# Altium PCB 04-12307_Drone_ESC.PcbDoc (part 1 of 5)
Units mm, origin at the board's own origin, x right, y up, seen from the top; angles counter-clockwise.
Board outline 55 x 33 mm, 4 copper layers (LAYER 1 (Top), LAYER 2, LAYER 3, LAYER 4 (Bottom)), stack 1.504 mm thick; 174 components, 90 nets, 407 pads, 193 vias.
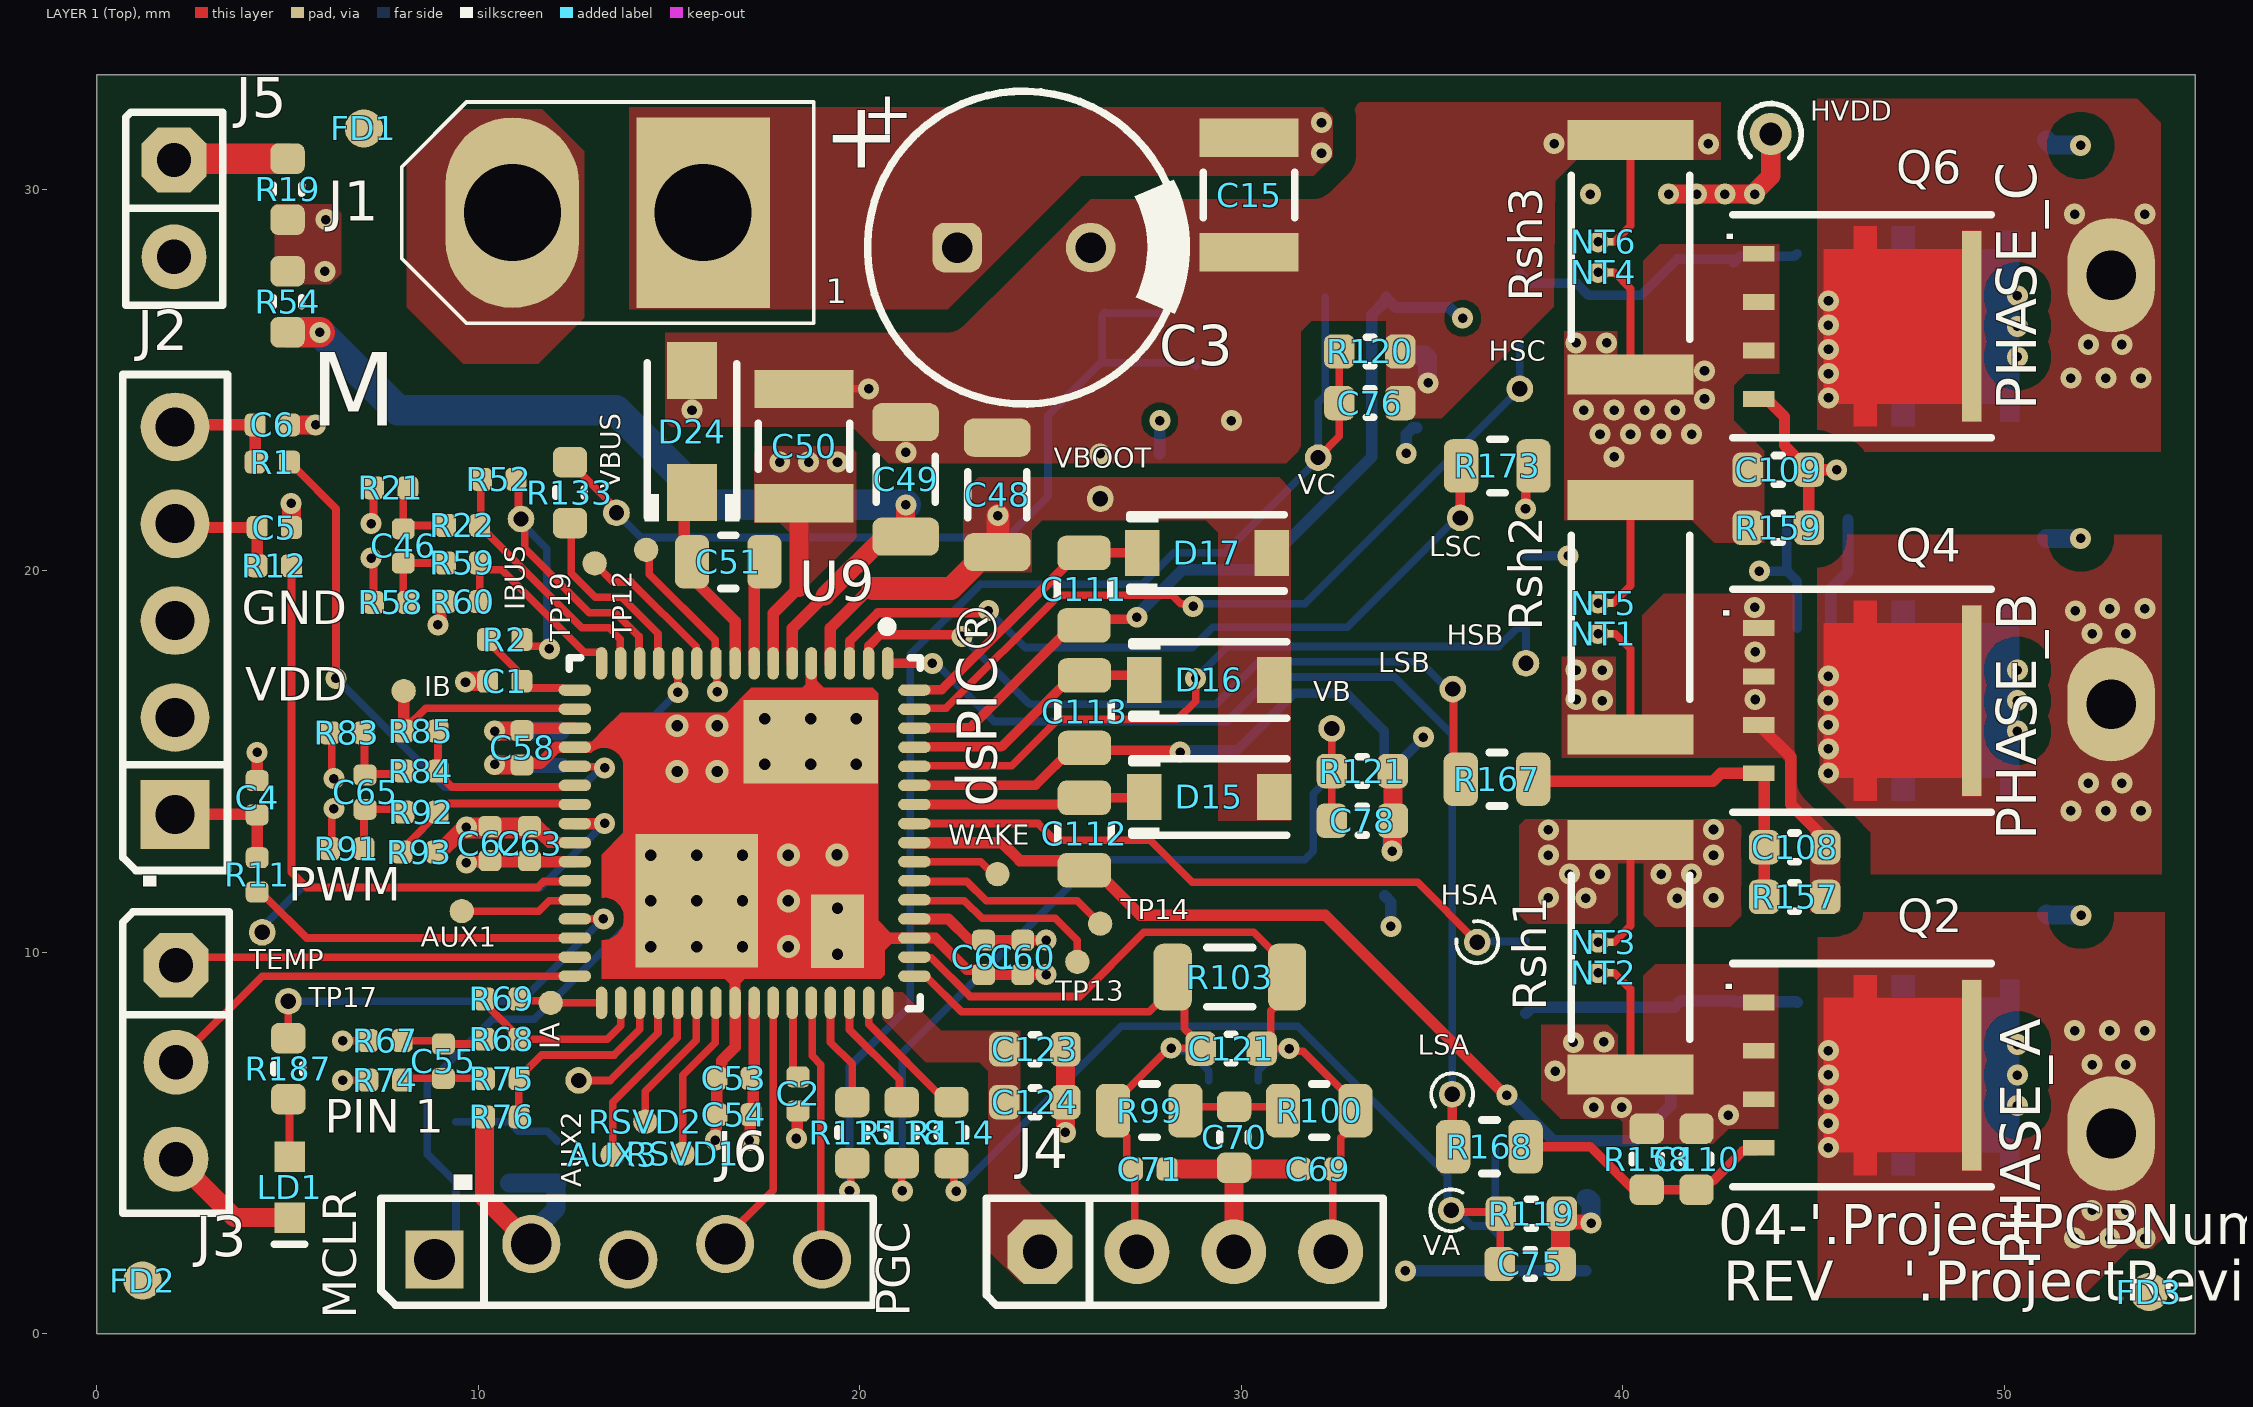
[diagram p0: LAYER 1 (Top) view]
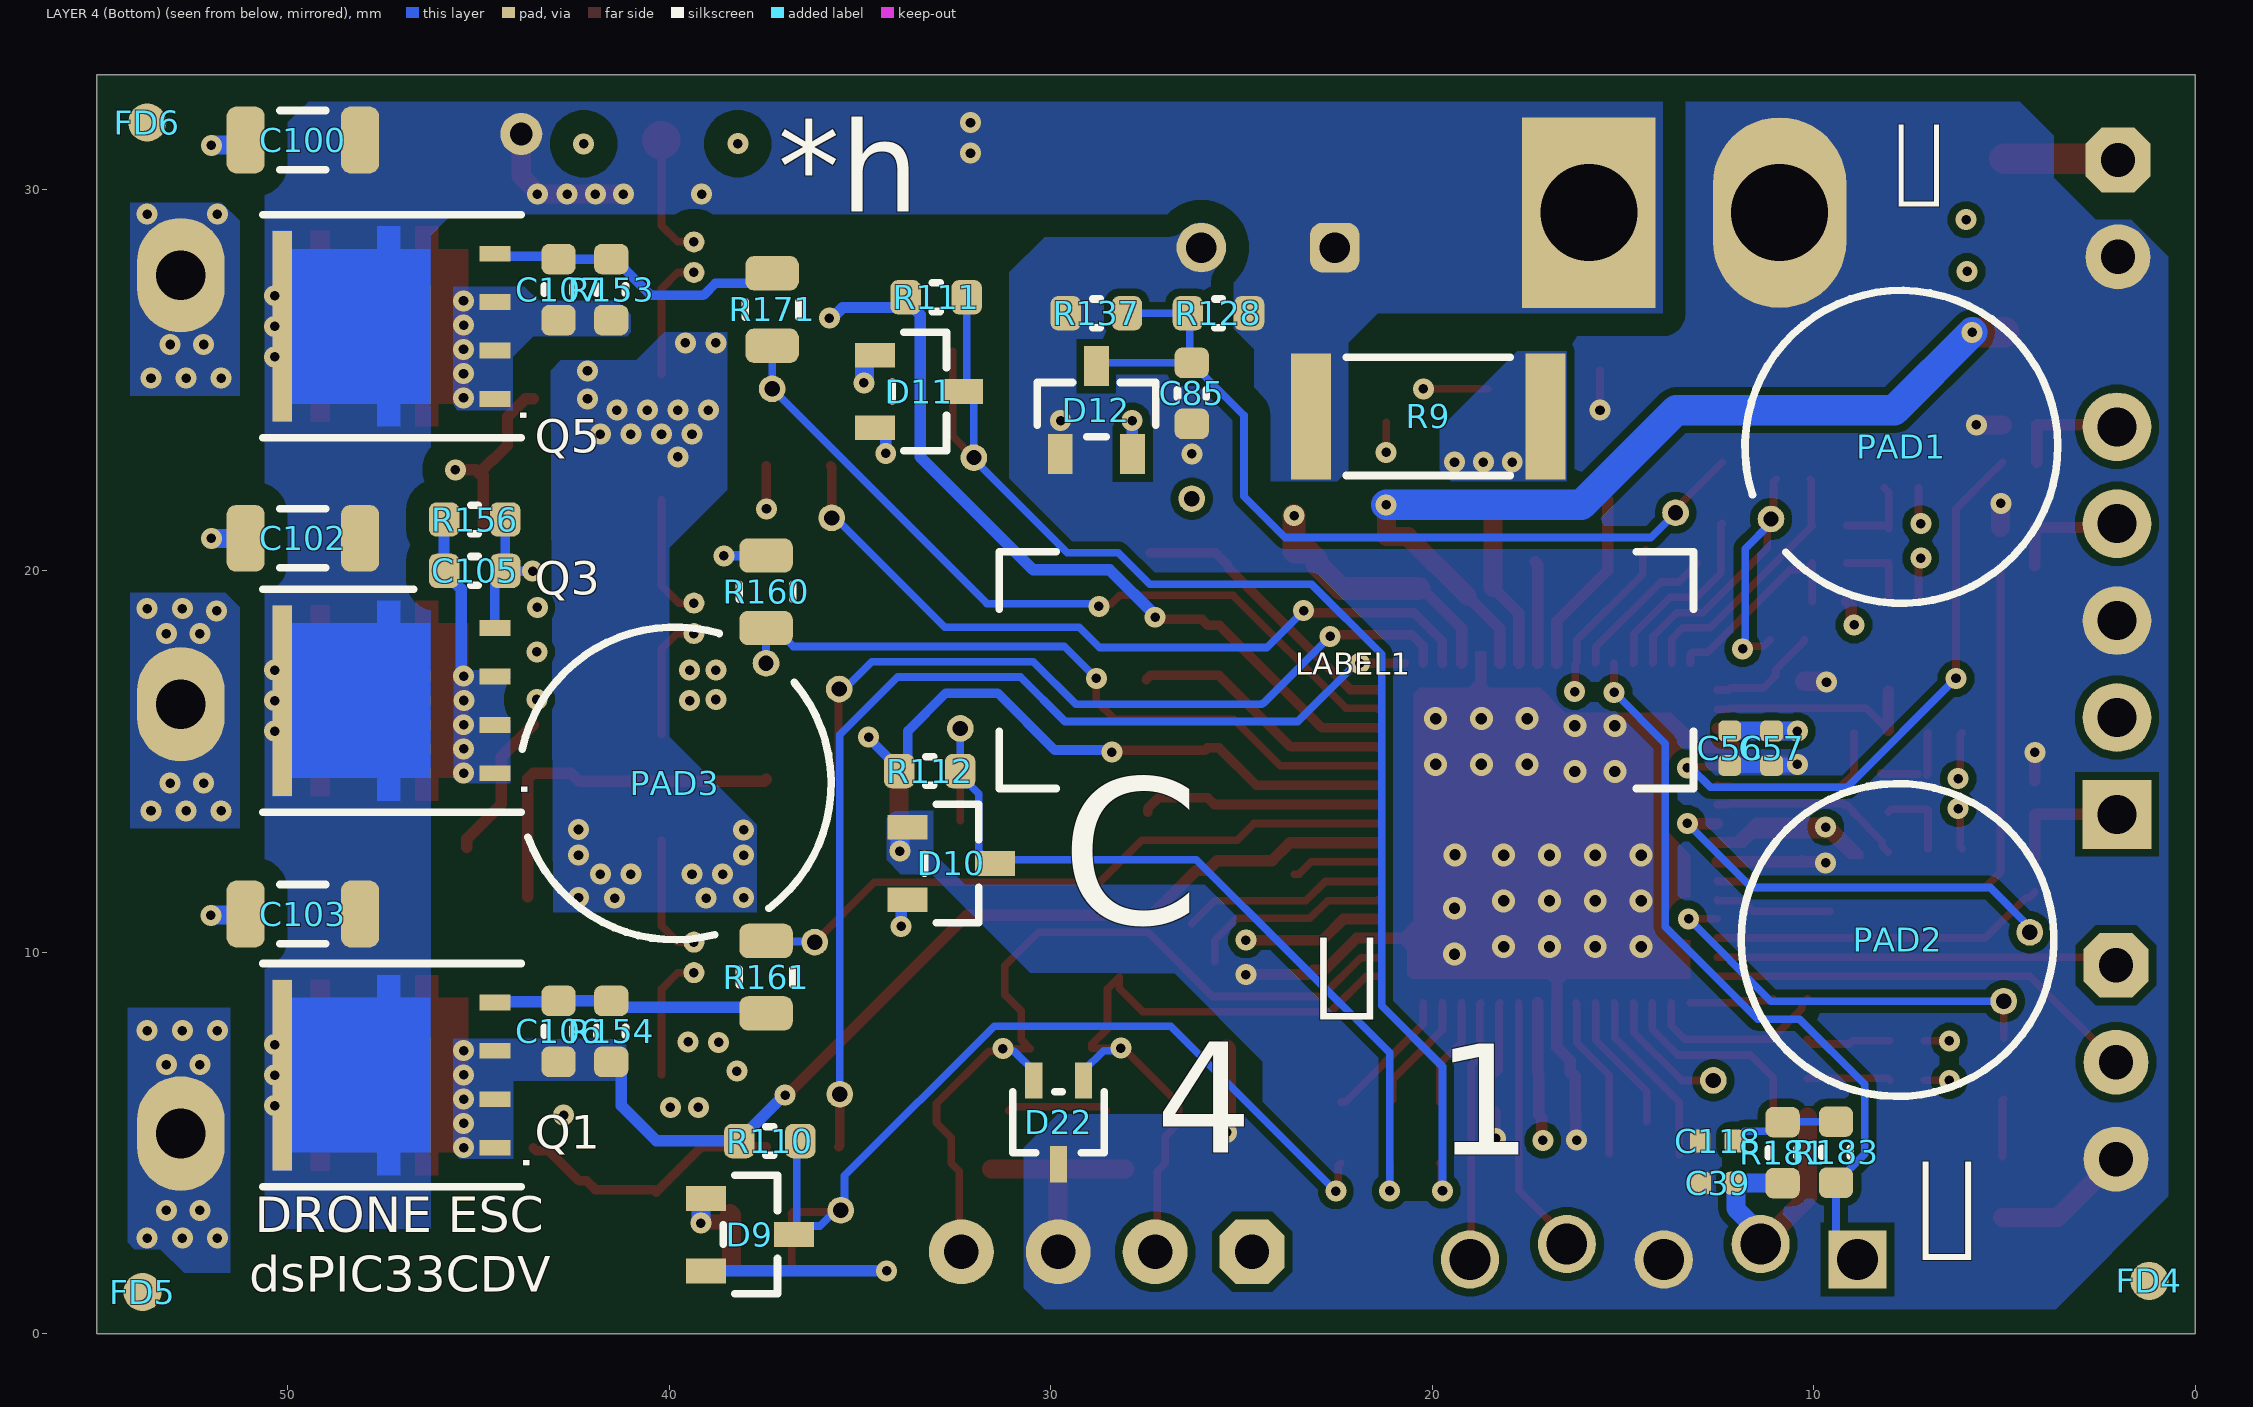
[diagram p1: LAYER 4 (Bottom) view, seen from below]
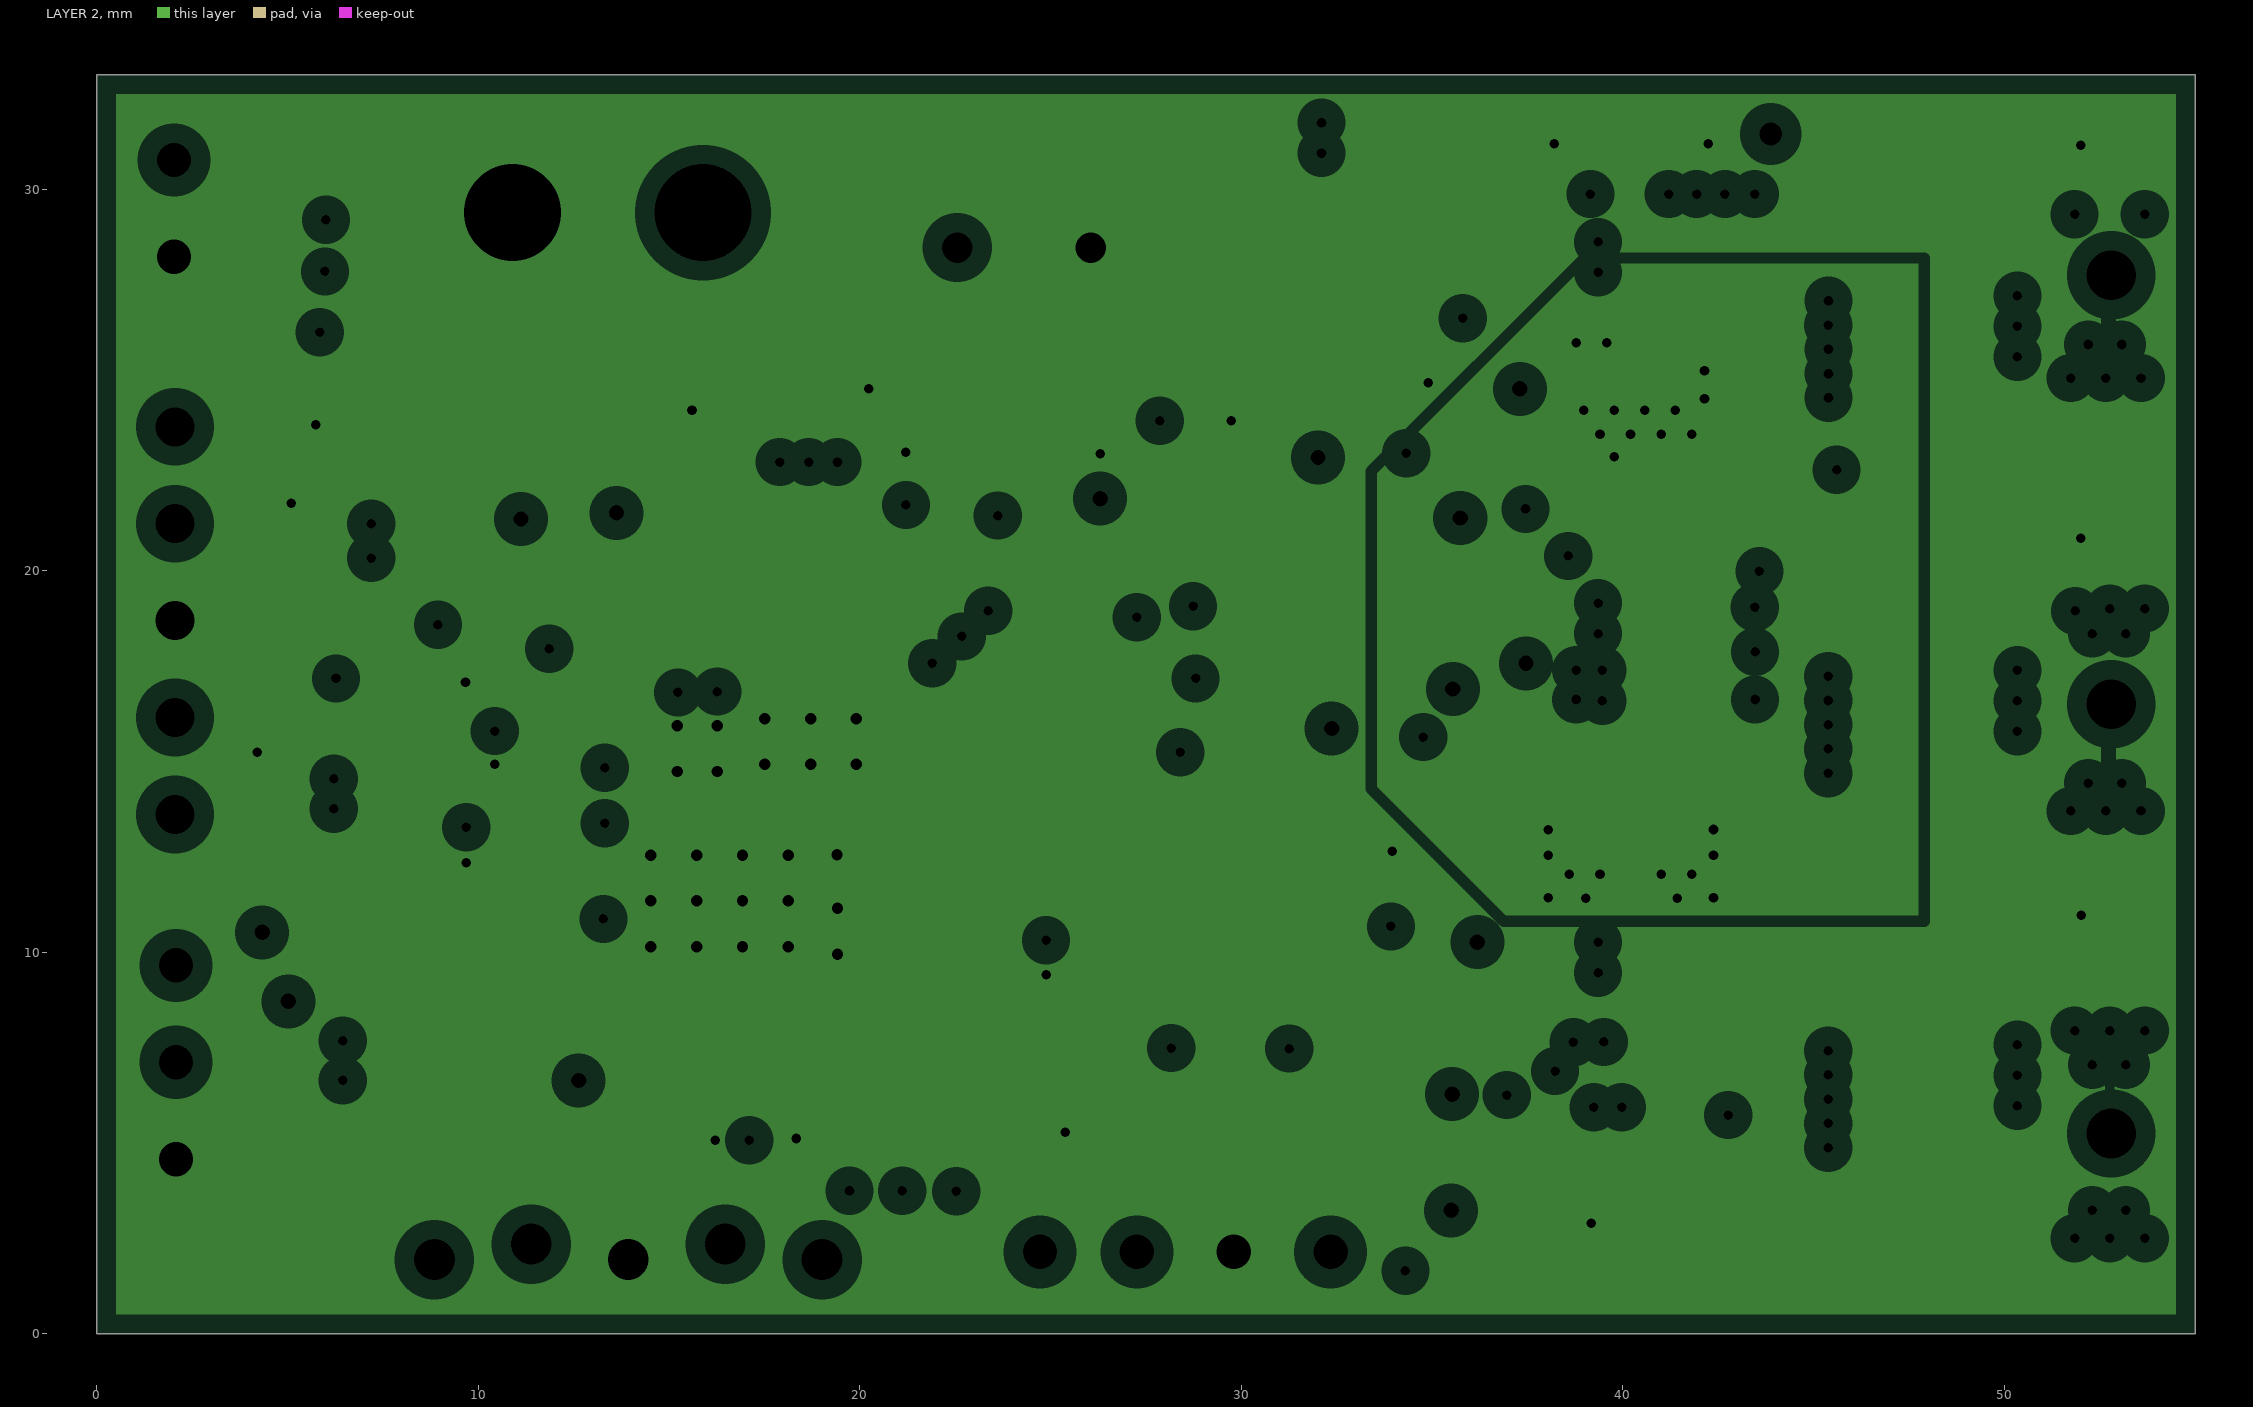
[diagram p2: LAYER 2, clearances drawn from the general rule]
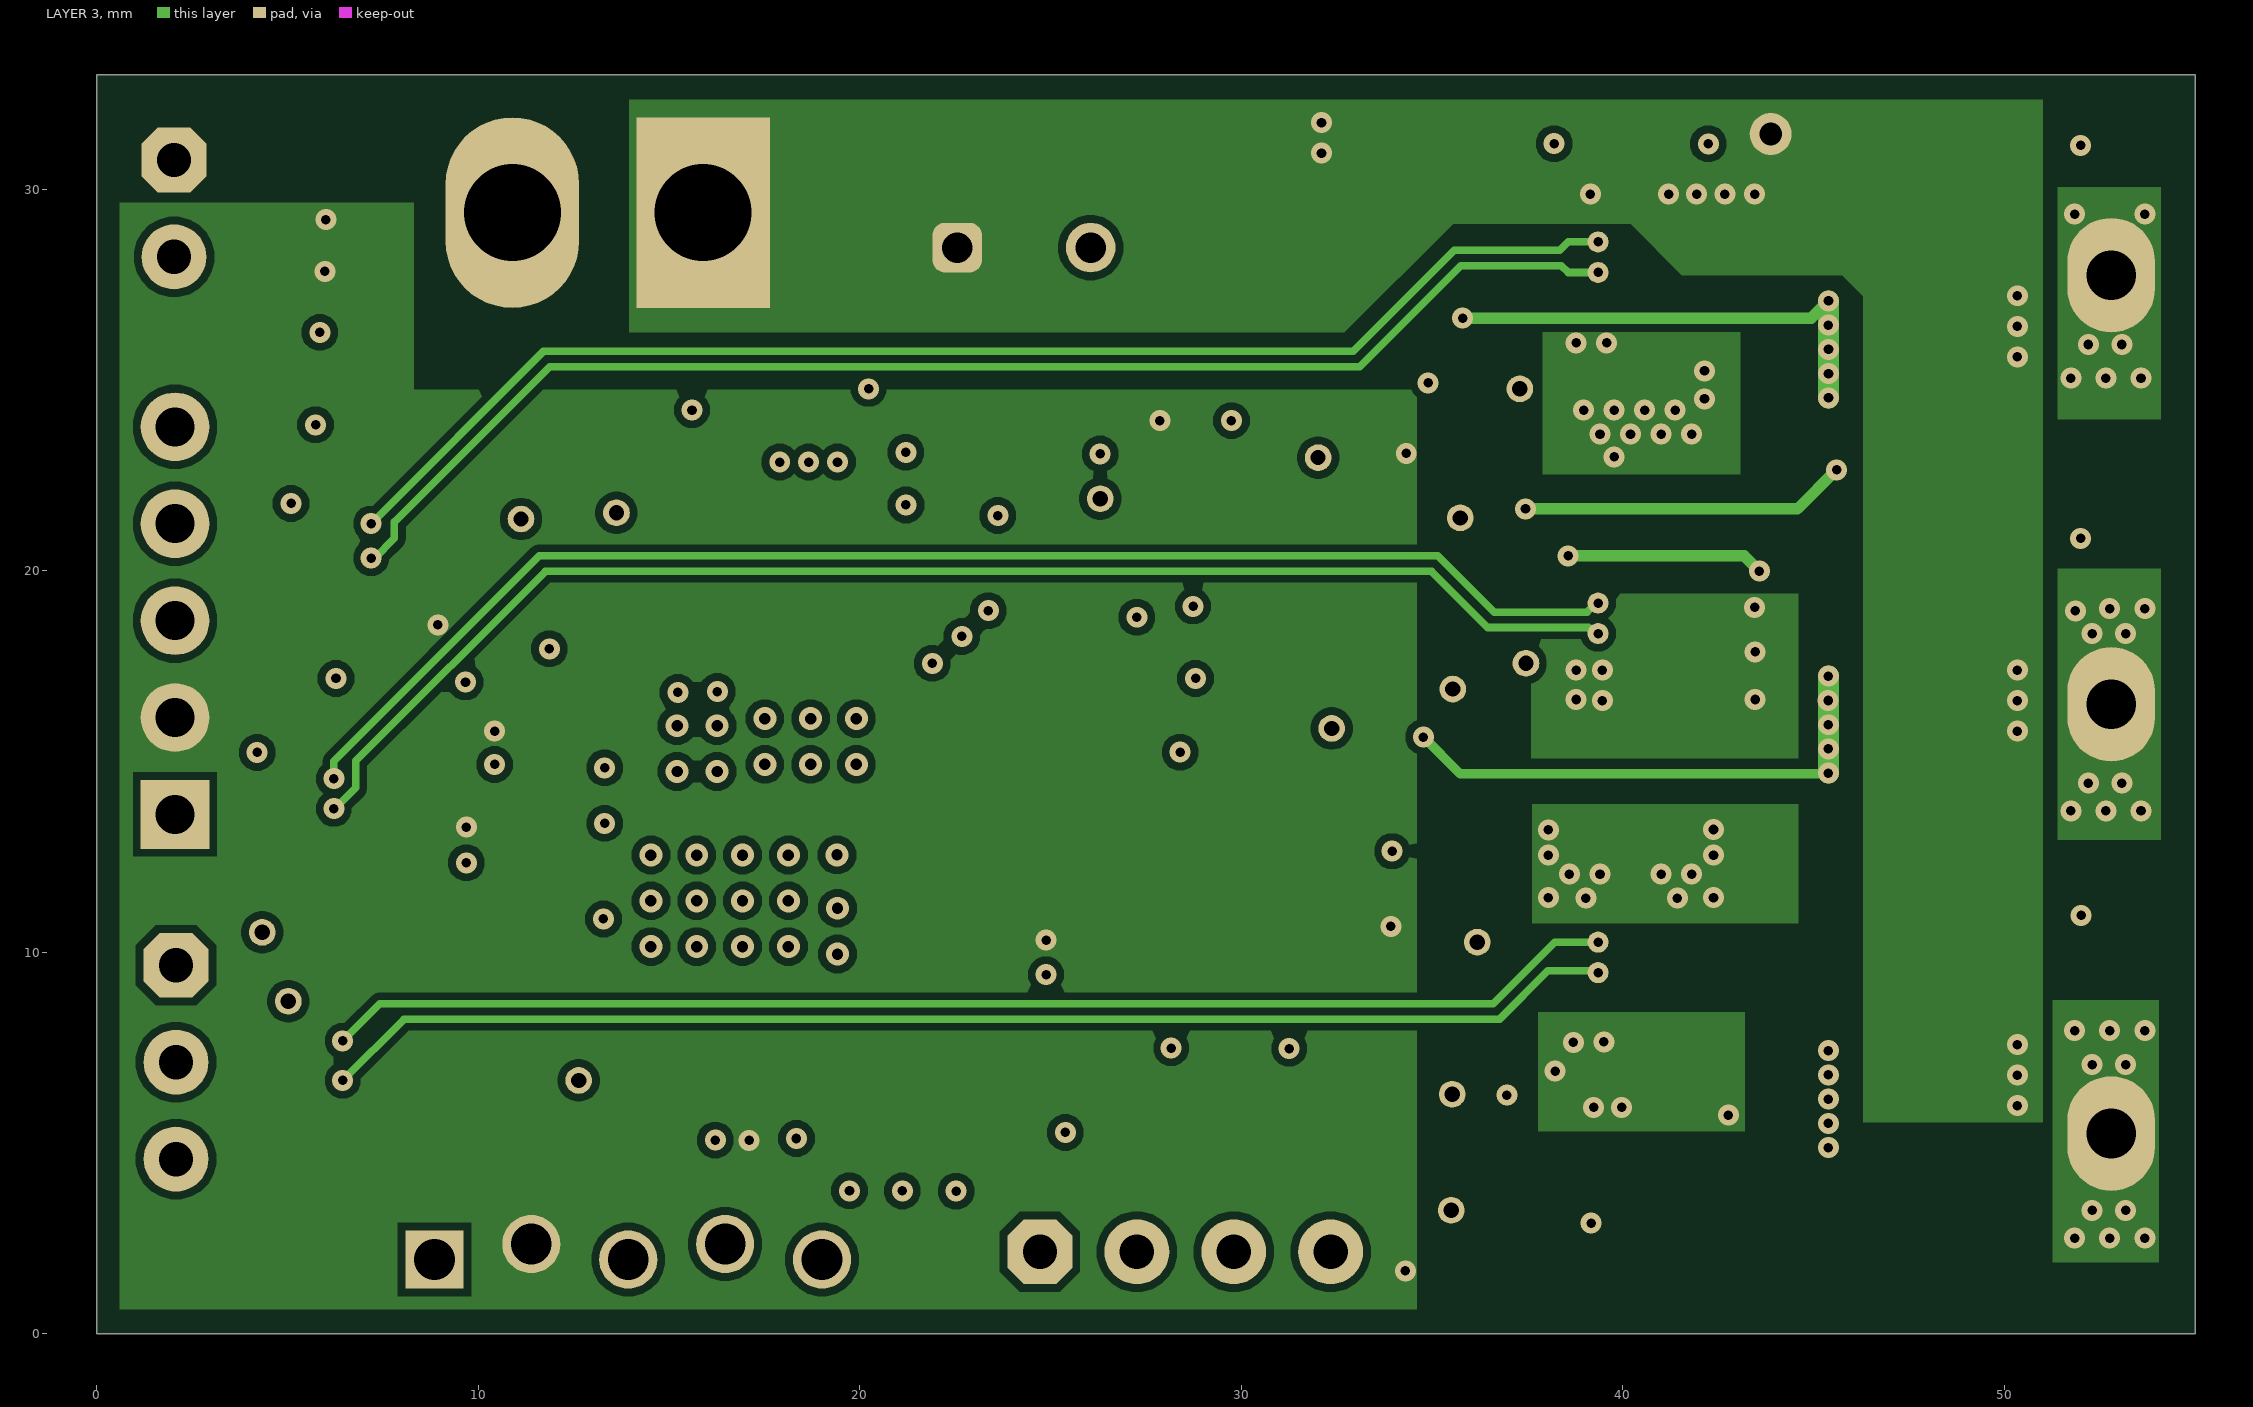
[diagram p3: LAYER 3]
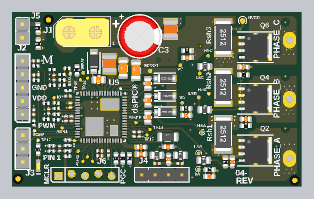
[diagram p6: 3D render of the assembled board from above, using the file's embedded part models]
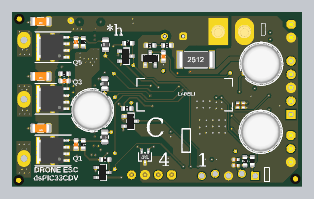
[diagram p7: 3D render of the assembled board from below, using the file's embedded part models]

## Layer stack, top to bottom
Top Solder: solder mask 0.01, Solder Resist, Dk 3.5
LAYER 1 (Top): signal copper 0.035
Dielectric 1: prepreg 0.4534, FR-4, Dk 4.4
LAYER 2: plane copper 0.035, net (Multiple Nets)
Dielectric 2: core 0.457, FR-4, Dk 4.6
LAYER 3: signal copper 0.035
Dielectric 3: prepreg 0.4534, FR-4, Dk 4.5
LAYER 4 (Bottom): signal copper 0.035
Bottom Solder: solder mask 0.01, Solder Resist, Dk 3.5

## Board outline
0,0 0,33 55,33 55,0

## Design rules (kind name [scope] priority, off if disabled: settings)
AcuteAngle [All] p1: minimum=4.50000000000000E+0001 checktracksonly=TRUE
BoardOutlineClearance BoardOutlineClearance_Overlay [OnLayer('Top Overlay','Bottom Overlay')] p1: gap=0.2 ignorepadtopadclearanceinfootprint=FALSE
BoardOutlineClearance [All] p2: gap=0.5 ignorepadtopadclearanceinfootprint=FALSE
Clearance Clear_VDCGND [InNet('VDC') And OnLayer('LAYER 1 (Top)')Or InNet('VDC') And OnLayer('LAYER 4 (Bottom)')] p1: gap=0.6 ignorepadtopadclearanceinfootprint=TRUE
Clearance Clear_PHASEx [InNet('PHASE_A') And OnLayer('LAYER 1 (Top)')   Or InNet('PHASE_A') And OnLayer('LAYER 4 (Bottom)') Or InNet('PHASE_B') And OnLayer('LAYER 1 (Top)')   Or InNet('PHASE_B') And OnLayer('LAYER 4 (Bottom)') Or  InNet('PHASE_C') And OnLayer('LAYER 1 (Top)')   Or InNet('PHASE_C') And OnLayer('LAYER 4 (Bottom)')] p2: gap=0.6 ignorepadtopadclearanceinfootprint=TRUE except(0.2: Arc-Arc Arc-Track Arc-SMDPad Arc-THPad Arc-Via Track-Track Track-SMDPad Track-THPad Track-Via; 0.4: SMDPad-SMDPad; 0.5: SMDPad-Via SMDPad-Region)
Clearance [All] p3: gap=0.2 ignorepadtopadclearanceinfootprint=TRUE
ComponentClearance ComponentClearance_ignore [HasFootprint('NET_TIE_0.2mmx0.5mm') vs HasFootprint('RES_C_2512')] p1: gap=0 collisioncheckmode=3 verticalgap=0 showdistances=FALSE donotcheckwithout3dbody=TRUE
ComponentClearance ComponentClearance_TP_ignore [HasFootprint('CON_TP_SMD_D25mil_NoSilk')] p2: gap=0 collisioncheckmode=3 verticalgap=0 showdistances=TRUE donotcheckwithout3dbody=TRUE
ComponentClearance ComponentClearance_TPThru_ignore [HasFootprint('CON_TP_SMD_D25mil_NoSilk')] p3: gap=0 collisioncheckmode=3 verticalgap=0 showdistances=TRUE checkcomponentboundary=TRUE
ComponentClearance ComponentClearance_TPThru_ignore_1 [HasFootprint('TP_TH_0.7PADX0.4HOLE')] p4: gap=0 collisioncheckmode=3 verticalgap=0 showdistances=TRUE donotcheckwithout3dbody=TRUE
ComponentClearance ComponentClearance_NTtoNT [HasFootprint('NET_TIE_0.2mmx0.5mm') vs HasFootprint('NET_TIE_0.2mmx0.5mm')] p5: gap=0 collisioncheckmode=3 verticalgap=0 showdistances=TRUE donotcheckwithout3dbody=TRUE checkcomponentboundary=TRUE
ComponentClearance ComponentClearance_FID [HasFootprint('Fiducial_1mm') vs HasFootprint('TP_3.0X2.3X1.3HOLE')] p6: gap=0 collisioncheckmode=3 verticalgap=0 showdistances=TRUE donotcheckwithout3dbody=TRUE
ComponentClearance [All] p7: gap=0.2 collisioncheckmode=3 verticalgap=0.2 showdistances=TRUE
DiffPairsRouting [All] p1: maxlimit=0.3 minlimit=0.2 mostfreqgap=0.25 toplayer_prefgap=0.2 toplayer_minwidth=0.2 toplayer_maxwidth=0.2 toplayer_prefwidth=0.2 midlayer2_prefgap=0.2 midlayer2_minwidth=0.2 midlayer2_maxwidth=0.2 midlayer2_prefwidth=0.2 bottomlayer_minwidth=0.2 bottomlayer_maxwidth=0.2 bottomlayer_prefwidth=0.2 maxuncoupledlength=12.7
FabricationTestPointUsage TestPointUsage [All] p1: valid=0 allowmultiple=FALSE
FabricationTestpoint Testpoint [All] p1: side=3 testpointundercomponent=TRUE minsize=1.016 maxsize=2.54 preferedsize=1.524 minholesize=0 maxholesize=1.016 preferedholesize=0.813 testpointgrid=0.025 allowsidetop=TRUE allowsidebottom=TRUE usegrid=TRUE gridtolerance=0
HoleSize [All] p1: absolutevalues=TRUE maxlimit=6 minlimit=0.25 maxpercent=80.000 minpercent=20.000
HoleToHoleClearance [All] p1: gap=0.3 allowstackedmicrovias=FALSE
MinimumAnnularRing MinimumAnnularRing_epad [HasFootprint('QFN-64_9X9_3EP')] p1: minimumring=0.1
MinimumAnnularRing [All] p2: minimumring=0.15
MinimumSolderMaskSliver MinimumSolderMaskSliver_6pin [HasFootprint ('HDR_M_1.27_1x6') vs HasFootprint ('HDR_M_1.27_1x6')] p1: minsoldermaskwidth=0.06
MinimumSolderMaskSliver [All] p2: minsoldermaskwidth=0.09
PasteMaskExpansion PasteMaskExpansion_DNP [IsPad AND HasCompParameterValue('Populated','DNP')] p1: expansion=-5
PasteMaskExpansion [All] p2: expansion=0
PlaneClearance PlaneClearance_pads [IsPad] p1: clearance=0.3
PlaneClearance PlaneClearance_drill [IsObjectKind('Hole')] p2: clearance=0.4
PlaneConnect PlaneConnect_full [IsVia] p1: planeconnectstyle=Direct reliefexpansion=0.5 reliefentries=4 reliefconductorwidth=0.3 reliefairgap=0.3
PlaneConnect [All] p2: planeconnectstyle=Relief reliefexpansion=0.3 reliefentries=4 reliefconductorwidth=0.25 reliefairgap=0.25
PolygonConnect PolygonConnect_0.7 [IsNamedPolygon('0.7mm') vs (InPadClass('All Pads'))] p1: connectstyle=Direct reliefconductorwidth=0.7 reliefentries=4 polygonreliefangle="90 Angle" airgapwidth=0.25
PolygonConnect PolygonConnect_0.5 [IsNamedPolygon('0.5mm') vs (InPadClass('All Pads'))] p2: connectstyle=Direct reliefconductorwidth=0.5 reliefentries=4 polygonreliefangle="90 Angle" airgapwidth=0.25
PolygonConnect PolygonConnect_full [All vs IsVia or IsNamedPolygon('full')] p3: connectstyle=Direct reliefconductorwidth=0 reliefentries=4 polygonreliefangle="90 Angle" airgapwidth=0.254
PolygonConnect [All] p4: connectstyle=Direct reliefconductorwidth=0.3 reliefentries=4 polygonreliefangle="90 Angle" airgapwidth=0.25
RoutingCorners [All] p1: cornerstyle=45-Degree minsetback=2.5 maxsetback=2.5
RoutingVias RoutingVias_Pref [All] p1: holewidth=0.25 width=0.625 viastyle="Through Hole" minholewidth=0.25 minwidth=0.6 maxholewidth=1.6 maxwidth=2.5 useviatemplates=TRUE viatemplateguid#1={35CE911A-9219-49C9-9F6D-D03F065585E3} viatemplatename#1=v55h30m38
RoutingVias [All] p2: holewidth=0.25 width=0.625 viastyle="Through Hole" minholewidth=0.25 minwidth=0.6 maxholewidth=1.6 maxwidth=2.5
SMDToCorner [All] p1: distance=0
ShortCircuit [IsNet] p1: allowed=FALSE
SilkToSilkClearance [All] p1: silktosilkclearance=0.15
SilkToSolderMaskClearance SilkscreenOverComponentPads_TPx [HasFootprint('TP_TH_0.7PADX0.4HOLE')] p1: minsilkscreentomaskgap=0.15 clearancetoexposedcopper=TRUE
SilkToSolderMaskClearance SilkscreenOverComponentPads_TPx_1 [HasFootprint('TP_1.1x0.6')] p2: minsilkscreentomaskgap=0.15 clearancetoexposedcopper=TRUE
SilkToSolderMaskClearance SilkscreenOverComponentPads_TPx_2 [HasFootprint('TP_3.0X2.3X1.3HOLE')] p3: minsilkscreentomaskgap=0.15 clearancetoexposedcopper=TRUE
SilkToSolderMaskClearance SilkscreenOverComponentPads [IsPad] p4: minsilkscreentomaskgap=0.2 clearancetoexposedcopper=TRUE
SolderMaskExpansion SolderMaskExpansion_Component_Via [IsComponentVia] p1: expansion=0.075 istentingtop=FALSE soldermaskfromhole=TRUE
SolderMaskExpansion SolderMaskExpansion_U9_QFN [HasFootprint('QFN-64_9X9_3EP_M9')] p2: expansion=0 istentingtop=FALSE
SolderMaskExpansion [All] p3: expansion=0.076 istentingtop=FALSE
SupplyNets "Schematic Supply Nets_8" [InNet('+3.3V_EXT')] p1: voltage=0.000
SupplyNets "Schematic Supply Nets_6" [InNet('VREG')] p2: voltage=0.000
SupplyNets "Schematic Supply Nets_5" [InNet('VDD')] p3: voltage=0.000
SupplyNets "Schematic Supply Nets_3" [InNet('VBOOT')] p4: voltage=0.000
SupplyNets "Schematic Supply Nets_11" [InNet('HVDD')] p5: voltage=0.000
SupplyNets "Schematic Supply Nets_7" [InNet('GND')] p6: voltage=0.000
SupplyNets "Schematic Supply Nets_4" [InNet('VDC')] p7: voltage=0.000
SupplyNets "Schematic Supply Nets_2" [InNet('+5V')] p8: voltage=0.000
UnRoutedNet [All] p1: checkbadconnections=TRUE
ViasUnderSMD [All] p1: allowed=FALSE
Width [All] p1: maxlimit=7 minlimit=0.2 preferedwidth=0.25
15 further rules are at their usual default settings.

## Classes and differential pairs
component class Sheet4_CAN_Interface: C2 C69 C70 C71 C121 C123 C124 D22 J4 R99 R100 R103
component class Sheet3_SenseCkts_Programming_Interface: C3 C4 C5 C6 C15 C75 C76 C78 C85 D9 D10 D11 D12 HVDD J1 J2 J3 J5 LD1 mi ms R1 R9 R11 R12 R19 R54 R110 R111 R112 R114 R115 R118 R119 R120 R121 R128 R133 R137 R187 TP17 VA VB VBUS VC
component class Sheet2_Inverter_GateDriver: C48 C49 C50 C51 C100 C102 C103 C105 C106 C107 C108 C109 C110 C111 C112 C113 D15 D16 D17 D24 HSA HSB HSC LSA LSB LSC NT1 NT2 NT3 NT4 NT5 NT6 PHASE_A PHASE_B PHASE_C Q1 Q2 Q3 Q4 Q5 Q6 R153 R154 R156 R157 R158 R159 R160 R161 R167 R168 R171 R173 Rsh1 Rsh2 Rsh3 VBOOT WAKE
component class Sheet1_dsPIC33CDV+OpAmp: AUX1 AUX2 AUX3 C1 C39 C46 C53 C54 C55 C56 C57 C58 C60 C61 C62 C63 C65 C118 FD1 FD2 FD3 FD4 FD5 FD6 IA IB IBUS J6 LABEL1 m PAD1 PAD2 PAD3 R2 R21 R22 R52 R58 R59 R60 R67 R68 R69 R74 R75 R76 R83 R84 R85 R91 R92 R93 R181 R183 RSVD1 RSVD2 TEMP TP12 TP13 TP14 TP19 U9

## Components (designator, comment, footprint, x,y, rotation, side; value= is the part's Value field where it differs from the comment)
AUX1 "Test Point No BOM" CON_TP_SMD_D25mil_NoSilk 9.565,11.08 r90 top value="TP SMD D25mil"
AUX2 "Test Point No BOM" TP_TH_0.7PADX0.4HOLE 12.629,6.642 r90 top
AUX3 "Test Point No BOM" CON_TP_SMD_D25mil_NoSilk 13.523,4.693 r90 top value="TP SMD D25mil"
C1 "Capacitor NP" CAP_C_0402 10.691,17.105 r180 top value=1000pF
C2 "Capacitor NP" CAP_C_0402 18.379,6.286 r90 top value=15pF
C3 "Capacitor POL" CAP_RAD_P3.5D8H13_WE 24.3,28.473 r180 top value=470uF
C4 "Capacitor NP" CAP_C_0402 4.203,14.052 r270 top value=0.1uF
C5 "Capacitor NP" CAP_C_0402 4.653,21.135 r180 top value=0.1uF
C6 "Capacitor NP" CAP_C_0402 4.6,23.826 r180 top value=0.1uF
C15 "Capacitor NP" CAP_C_1210 30.2,29.85 r90 top value=10uF
C39 "Capacitor NP" CAP_C_0402 12.515,3.949 r180 bottom value=0.1uF
C46 "Capacitor NP" CAP_C_0402 8.031,20.651 r90 top value=1000pF
C48 "Capacitor NP" CAP_C_1206 23.601,21.99 r90 top value=10uF
C49 "Capacitor NP" CAP_C_1206 21.2,22.397 r90 top value=4.7uF
C50 "Capacitor NP" CAP_C_1210 18.539,23.27 r270 top value=10uF
C51 "Capacitor NP" CAP_C_0805 16.551,20.237 r180 top value=1uF
C53 "Capacitor NP" CAP_C_0402 16.7,6.7 r0 top value=0.1uF
C54 "Capacitor NP" CAP_C_0402 16.7,5.744 r0 top value=10000pF
C55 "Capacitor NP" CAP_C_0402 9.083,7.147 r90 top value=1000pF
C56 "Capacitor NP" CAP_C_0402 12.2,15.35 r90 bottom value=1uf
C57 "Capacitor NP" CAP_C_0402 11.1,15.35 r90 bottom value=0.1uF
C58 "Capacitor NP" CAP_C_0402 11.146,15.359 r90 top value=10000pF
C60 "Capacitor NP" CAP_C_0402 24.269,9.867 r90 top value=0.1uF
C61 "Capacitor NP" CAP_C_0402 23.244,9.867 r90 top value=10000pF
C62 "Capacitor NP" CAP_C_0402 10.304,12.851 r90 top value=0.1uF
C63 "Capacitor NP" CAP_C_0402 11.344,12.851 r90 top value=10000pF
C65 "Capacitor NP" CAP_C_0402 7.029,14.2 r90 top value=1000pF
C69 "Capacitor NP" CAP_C_0402 32,4.32 r180 top value=100pF
C70 "Capacitor NP" CAP_C_0603 29.81,5.151 r90 top value=4700pF
C71 "Capacitor NP" CAP_C_0402 27.6,4.32 r0 top value=100pF
C75 "Capacitor NP" CAP_C_0603 37.569,1.831 r180 top value=1000pF
C76 "Capacitor NP" CAP_C_0603 33.369,24.396 r180 top value=1000pF
C78 "Capacitor NP" CAP_C_0603 33.169,13.45 r180 top value=1000pF
C85 "Capacitor NP" CAP_C_0603 26.3,24.65 r90 bottom value=0.1uF
C100 "Capacitor NP" CAP_C_1206 49.6,31.292 r0 bottom value=4.7uF
C102 "Capacitor NP" CAP_C_1206 49.6,20.852 r0 bottom value=4.7uF
C103 "Capacitor NP" CAP_C_1206 49.6,11.004 r0 bottom value=4.7uF
C105 "Capacitor NP" CAP_C_0603 45.1,19.999 r180 bottom value=2200pF
C106 "Capacitor NP" CAP_C_0603 42.899,7.928 r90 bottom value=2200pF
C107 "Capacitor NP" CAP_C_0603 42.899,27.371 r90 bottom value=2200pF
C108 "Capacitor NP" CAP_C_0603 44.5,12.753 r180 top value=2200pF
C109 "Capacitor NP" CAP_C_0603 44.075,22.647 r0 top value=2200pF
C110 "Capacitor NP" CAP_C_0603 41.931,4.581 r270 top value=2200pF
C111 "Capacitor NP" CAP_C_0805 25.874,19.519 r90 top value=0.22uF
C112 "Capacitor NP" CAP_C_0805 25.885,13.102 r90 top value=0.22uF
C113 "Capacitor NP" CAP_C_0805 25.889,16.309 r90 top value=0.22uF
C118 "Capacitor NP" CAP_C_0402 12.515,5.05 r180 bottom value=0.1uF
C121 "Capacitor NP" CAP_C_0603 29.73,7.477 r0 top value=100pF
C123 "Capacitor NP" CAP_C_0603 24.588,7.46 r0 top value=1uF
C124 "Capacitor NP" CAP_C_0603 24.588,6.069 r180 top value=0.1uF
D9 "Diode Schottky Dual AK" SOT-23-3 37.881,2.6 r270 bottom value=BAS40-04
D10 "Diode Schottky Dual AK" SOT-23-3 32.606,12.33 r270 bottom value=BAS40-04
D11 "Diode Schottky Dual AK" SOT-23-3 33.45,24.7 r270 bottom value=BAS40-04
D12 "Diode Schottky Dual AK" SOT-23-3 28.8,24.213 r180 bottom value=BAS40-04
D15 "Diode Schottky" SOD-123 29.158,14.072 r180 top value=PMEG4010CEH,115
D16 "Diode Schottky" SOD-123 29.158,17.139 r180 top value=PMEG4010CEH,115
D17 "Diode Schottky" SOD-123 29.1,20.469 r180 top value=PMEG4010CEH,115
D22 "Diode K1K2CC ESD Bidirectional" SOT-323-3 29.792,5.542 r0 bottom value=PESD2CANFD27V-UX
D24 "Diode Schottky" SOD-123W 15.6,23.65 r270 top value=PMEG6020ELRX
FD1 "FIDUCIAL ROUND" Fiducial_1mm 7,31.6 r0 top value=Fiducial
FD2 "FIDUCIAL ROUND" Fiducial_1mm 1.2,1.4 r0 top locked value=Fiducial
FD3 "FIDUCIAL ROUND" Fiducial_1mm 53.8,1.1 r0 top value=Fiducial
FD4 "FIDUCIAL ROUND" Fiducial_1mm 1.198,1.394 r180 bottom value=Fiducial
FD5 "FIDUCIAL ROUND" Fiducial_1mm 53.8,1.1 r180 bottom locked value=Fiducial
FD6 "FIDUCIAL ROUND" Fiducial_1mm 53.679,31.756 r180 bottom value=Fiducial
HSA "Test Point No BOM" TP_TH_0.7PADX0.4HOLE 36.184,10.267 r90 top
HSB "Test Point No BOM" TP_TH_0.7PADX0.4HOLE 37.459,17.575 r270 top
HSC "Test Point No BOM" TP_TH_0.7PADX0.4HOLE 37.3,24.77 r90 top
HVDD "Test Point No BOM" TP_1.1x0.6 43.875,31.45 r90 top value="TP TH D1.1H0.6"
IA "Test Point No BOM" CON_TP_SMD_D25mil_NoSilk 11.895,8.675 r0 top value="TP SMD D25mil"
IB "Test Point No BOM" CON_TP_SMD_D25mil_NoSilk 8.043,16.85 r90 top value="TP SMD D25mil"
IBUS "Test Point No BOM" TP_TH_0.7PADX0.4HOLE 11.118,21.358 r180 top
J1 "CON 1x2 POLARIZED" "CON TERMINAL XT30U-M 5mm 1x2 Male 30A TH V" 13.39,29.388 r180 top value="XT30U-M 1x2"
J2 "Header 1x5" HDR_M_2.54_1x5_MH5.84_IH2.54_TH3.2_TH_VERT 2.049,18.695 r90 top value="HDR-2.54 Male 1x5"
J3 "Header 1x3" HDR_M_2.54_1x3_TH_V_SAM_TSW-103-08-G-S 2.074,7.119 r270 top value="HDR-2.54 Male 1x3"
J4 "Header 1x4" HDR_M_2.54_1x4 28.53,2.15 r0 top value="HDR-2.54 Male 1x4"
J5 "Header 1x2" HDR_M_2.54_1x2_TH_V_SAM_TSW-102-08-G-S 2.024,29.499 r270 top value="HDR-2.54 Male 1x2"
J6 "" HDR_M_2.54_1x5_STAGGERED 13.929,2.15 r0 top value="HDR-2.54 Male 1x5 STAGGERED"
LABEL1 "08-10015" 08-10015 22.25,17.395 r180 bottom value="PCBA LABEL 18X6mm"
LD1 "LED_yellow" LED_0603_Yellow 5.05,3.847 r270 top value=YELLOW
LSA "Test Point No BOM" TP_TH_0.7PADX0.4HOLE 35.525,6.28 r0 top
LSB "Test Point No BOM" TP_TH_0.7PADX0.4HOLE 35.544,16.9 r0 top
LSC "Test Point No BOM" TP_TH_0.7PADX0.4HOLE 35.737,21.387 r90 top
NT1 "Net Tie" NET_TIE_0.2mmx0.5mm 39.5,18.355 r0 top net-tie
NT2 "Net Tie" NET_TIE_0.2mmx0.5mm 39.5,9.467 r0 top net-tie
NT3 "Net Tie" NET_TIE_0.2mmx0.5mm 39.5,10.267 r0 top net-tie
NT4 "Net Tie" NET_TIE_0.2mmx0.5mm 39.5,27.821 r0 top net-tie
NT5 "Net Tie" NET_TIE_0.2mmx0.5mm 39.5,19.155 r0 top net-tie
NT6 "Net Tie" NET_TIE_0.2mmx0.5mm 39.5,28.621 r0 top net-tie
PAD1 "Rubber Pad Cylindrical" BUMP_3M_SJ61A1_CYLINDRICAL_BLACK_D7.9H5.08 7.7,23.25 r180 bottom value="Rubber Pad Cyl D7.9H5.08"
PAD2 "Rubber Pad Cylindrical" BUMP_3M_SJ61A1_CYLINDRICAL_BLACK_D7.9H5.08 7.8,10.323 r180 bottom value="Rubber Pad Cyl D7.9H5.08"
PAD3 "Rubber Pad Cylindrical" BUMP_3M_SJ61A1_CYLINDRICAL_BLACK_D7.9H5.08 39.851,14.428 r180 bottom locked value="Rubber Pad Cyl D7.9H5.08"
PHASE_A "Test Point No BOM" TP_3.0X2.3X1.3HOLE 52.8,5.25 r90 top locked value="TP 3.0mm x 2.3mm PAD 1.3mm HOLE"
PHASE_B "Test Point No BOM" TP_3.0X2.3X1.3HOLE 52.8,16.5 r90 top locked value="TP 3.0mm x 2.3mm PAD 1.3mm HOLE"
PHASE_C "Test Point No BOM" TP_3.0X2.3X1.3HOLE 52.8,27.751 r90 top locked value="TP 3.0mm x 2.3mm PAD 1.3mm HOLE"
Q1 "Transistor MOS-N SSSGD" PPAK_SO-8L 47.354,6.78 r90 bottom value=SIJA72ADP-T1-GE3
Q2 "Transistor MOS-N SSSGD" PPAK_SO-8L 46.351,6.78 r270 top value=SIJA72ADP-T1-GE3
Q3 "Transistor MOS-N SSSGD" PPAK_SO-8L 47.354,16.595 r90 bottom value=SIJA72ADP-T1-GE3
Q4 "Transistor MOS-N SSSGD" PPAK_SO-8L 46.351,16.595 r270 top value=SIJA72ADP-T1-GE3
Q5 "Transistor MOS-N SSSGD" PPAK_SO-8L 47.354,26.41 r90 bottom value=SIJA72ADP-T1-GE3
Q6 "Transistor MOS-N SSSGD" PPAK_SO-8L 46.351,26.41 r270 top value=SIJA72ADP-T1-GE3
R1 "Resistor" RES_C_0402 4.6,22.85 r0 top value=0R
R2 "Resistor" RES_C_0402 10.691,18.198 r180 top value=2.2k
R9 "Resistor" RES_C_2512 20.1,24.05 r180 bottom value=0R
R11 "Resistor" RES_C_0402 4.203,12.03 r270 top value=0R
R12 "Resistor" RES_C_0402 4.652,20.131 r0 top value=0R
R19 "Resistor" RES_C_0603 5,30.004 r90 top value=0R
R21 "Resistor" RES_C_0402 7.7,22.174 r0 top value=62R
R22 "Resistor" RES_C_0402 9.584,21.188 r0 top value=360R
R52 "Resistor" RES_C_0402 10.534,22.397 r0 top value=3.4k
R54 "" RES_C_0603 5,27.05 r90 top value=0R
R58 "Resistor" RES_C_0402 7.7,19.172 r0 top value=62R
R59 "Resistor" RES_C_0402 9.584,20.205 r0 top value=360R
R60 "Resistor" RES_C_0402 9.584,19.194 r180 top value=7.5k
R67 "Resistor" RES_C_0402 7.555,7.686 r0 top value=62R
R68 "Resistor" RES_C_0402 10.612,7.723 r0 top value=360R
R69 "Resistor" RES_C_0402 10.609,8.777 r0 top value=3.4k
R74 "Resistor" RES_C_0402 7.555,6.649 r0 top value=62R
R75 "Resistor" RES_C_0402 10.612,6.685 r0 top value=360R
R76 "Resistor" RES_C_0402 10.612,5.685 r180 top value=7.5k
R83 "Resistor" RES_C_0402 6.554,15.752 r0 top value=62R
R84 "Resistor" RES_C_0402 8.491,14.75 r0 top value=360R
R85 "Resistor" RES_C_0402 8.491,15.8 r180 top value=3.4k
R91 "Resistor" RES_C_0402 6.551,12.719 r0 top value=62R
R92 "Resistor" RES_C_0402 8.498,13.675 r0 top value=360R
R93 "Resistor" RES_C_0402 8.448,12.628 r0 top value=7.5k
R99 "Resistor" RES_C_0805 27.587,5.85 r180 top value=60.4R
R100 "Resistor" RES_C_0805 32.042,5.85 r0 top value=60.4R
R103 "Resistor" RES_C_1206 29.7,9.35 r0 top value=60.4R
R110 "Resistor" RES_C_0603 37.359,5.052 r180 bottom value=18k
R111 "Resistor" RES_C_0603 33,27.171 r180 bottom value=18k
R112 "Resistor" RES_C_0603 33.169,14.75 r180 bottom value=18k
R114 "Resistor" RES_C_0603 22.4,5.275 r90 top value=100R
R115 "Resistor" RES_C_0603 19.8,5.275 r90 top value=100R
R118 "Resistor" RES_C_0603 21.1,5.275 r90 top value=100R
R119 "Resistor" RES_C_0603 37.6,3.15 r0 top value=1.8k
R120 "Resistor" RES_C_0603 33.369,25.75 r0 top value=1.8k
R121 "Resistor" RES_C_0603 33.169,14.75 r0 top value=1.8k
R128 "Resistor" RES_C_0603 25.6,26.75 r0 bottom value=18k
R133 "Resistor" RES_C_0603 12.4,22.05 r270 top value=100R
R137 "Resistor" RES_C_0603 28.8,26.75 r0 bottom value=1.8k
R153 "Resistor" RES_C_0603 41.519,27.373 r270 bottom value=332k
R154 "Resistor" RES_C_0603 41.519,7.928 r270 bottom value=332k
R156 "Resistor" RES_C_0603 45.1,21.343 r0 bottom value=332k
R157 "Resistor" RES_C_0603 44.5,11.453 r0 top value=332k
R158 "Resistor" RES_C_0603 40.625,4.581 r90 top value=332k
R159 "Resistor" RES_C_0603 44.075,21.13 r180 top value=332k
R160 "Resistor" RES_C_0805 37.459,19.45 r90 bottom value=47R
R161 "Resistor" RES_C_0805 37.459,9.35 r270 bottom value=47R
R167 "Resistor" RES_C_0805 36.7,14.537 r0 top value=47R
R168 "Resistor" RES_C_0805 36.5,4.904 r0 top value=47R
R171 "Resistor" RES_C_0805 37.3,26.85 r90 bottom value=47R
R173 "Resistor" RES_C_0805 36.709,22.75 r0 top value=47R
R181 "Resistor" RES_C_0603 10.813,4.749 r90 bottom value=4.7k
R183 "Resistor" RES_C_0603 9.415,4.76 r270 bottom value=470R
R187 "Resistor" RES_C_0603 5.019,6.95 r270 top value=6.8k
Rsh1 "Resistor" RES_C_2512 40.2,9.867 r270 top locked value=0.01R
Rsh2 "Resistor" RES_C_2512 40.2,18.785 r270 top locked value=0.01R
Rsh3 "Resistor" RES_C_2512 40.2,28.221 r270 top value=0.01R
RSVD1 "Test Point No BOM" CON_TP_SMD_D25mil_NoSilk 15.359,4.718 r90 top value="TP SMD D25mil"
RSVD2 "Test Point No BOM" CON_TP_SMD_D25mil_NoSilk 14.376,5.559 r90 top value="TP SMD D25mil"
TEMP "Test Point No BOM" TP_TH_0.7PADX0.4HOLE 4.334,10.523 r90 top
TP12 "Test Point No BOM" CON_TP_SMD_D25mil_NoSilk 14.4,20.55 r0 top value="TP SMD D25mil"
TP13 "Test Point No BOM" CON_TP_SMD_D25mil_NoSilk 25.7,9.75 r0 top value="TP SMD D25mil"
TP14 "Test Point No BOM" CON_TP_SMD_D25mil_NoSilk 26.3,10.75 r0 top value="TP SMD D25mil"
TP17 "Test Point No BOM" TP_TH_0.7PADX0.4HOLE 5.019,8.717 r0 top
TP19 "Test Point No BOM" CON_TP_SMD_D25mil_NoSilk 13.049,20.197 r0 top value="TP SMD D25mil"
U9 "dsPIC33CDVC256MP506_VGQFN-64" QFN-64_9X9_3EP_M9 16.979,13.125 r270 top value=dsPIC33CDVC256MP506-E/M9
VA "Test Point No BOM" TP_TH_0.7PADX0.4HOLE 35.5,3.238 r270 top
VB "Test Point No BOM" TP_TH_0.7PADX0.4HOLE 32.366,15.868 r270 top
VBOOT "Test Point No BOM" TP_TH_0.7PADX0.4HOLE 26.3,21.89 r90 top
VBUS "Test Point No BOM" TP_TH_0.7PADX0.4HOLE 13.619,21.52 r0 top
VC "Test Point No BOM" TP_TH_0.7PADX0.4HOLE 32.012,22.967 r90 top
WAKE "Test Point No BOM" CON_TP_SMD_D25mil_NoSilk 23.608,12.049 r90 top value="TP SMD D25mil"

## Footprints (in the part's own frame and the unit in brackets; to place one, negate y for a bottom-side part, rotate by r counter-clockwise, add the part's x,y. Pads: shape width x height; smd on the part's side, far side on the other; paste and mask are expansions set on the pad)
08-10015 [mm]
  silkscreen extent -9.1,-3.1 9.1,3.1, body extent -9,-3 9,3, height 0.1
BUMP_3M_SJ61A1_CYLINDRICAL_BLACK_D7.9H5.08 [mm] "3M Bumpon Cylindrical D=7.9mm, H5.08mm"
  silkscreen extent -4.1,-4.1 4.1,4.1, body extent -3.96,-3.96 3.96,3.96, height 5.08
CAP_C_0402 [mm] "Chip Capacitor, 2-Leads, Body 1.0x0.5mm, IPC High Density"
  rrect50% 0.55x0.6 smd: 1(-0.45,0) 2(0.45,0)
  body extent -0.5,-0.25 0.5,0.25, height 0.71
CAP_C_0603 [mm] "Chip Capacitor, 2-Leads, Body 1.6x0.8mm, IPC Medium Density"
  rrect50% 0.8x0.9 smd: 1(-0.8,0) 2(0.8,0)
  silkscreen extent -0.1,-0.38 0.1,0.38, body extent -0.8,-0.4 0.8,0.4, height 0.85
CAP_C_0805 [mm] "Chip Capacitor, 2-Leads, Body 2.0x1.3mm, IPC Medium Density"
  rrect50% 0.9x1.4 smd: 1(-0.95,0) 2(0.95,0)
  silkscreen extent -0.2,-0.7 0.2,0.7, body extent -1,-0.62 1,0.63, height 0.78
CAP_C_1206 [mm] "Chip Capacitor, 2-Leads, Body 3.2x1.6mm, IPC Medium Density"
  rrect50% 1x1.75 smd: 1(-1.5,0) 2(1.5,0)
  silkscreen extent -0.6,-0.77 0.6,0.77, body extent -1.6,-0.8 1.6,0.8, height 1
CAP_C_1210 [mm] "Chip Capacitor, 2-Leads, Body 3.2x2.5mm, IPC Medium Density"
  rect 1x2.6 smd: 1(-1.5,0) 2(1.5,0)
  silkscreen extent -0.6,-1.2 0.6,1.2, body extent -1.6,-1.25 1.6,1.25, height 0.95
CAP_RAD_P3.5D8H13_WE [mm] "Capacitor, Electrolytic, Radial; Body P=3.5mm, D=8mm, H=13mm"
  rrect50% 1.3x1.3 hole 0.8: 1(1.75,0)
  round 1.3 hole 0.8: 2(-1.75,0)
  silkscreen extent -4.35,-4.1 4.1,4.1, body extent -3.99,-4 3.99,3.99, height 14.11
"CON TERMINAL XT30U-M 5mm 1x2 Male 30A TH V" [mm]
  rect 3.5x5 hole 2.54: 1(-2.5,0)
  oval 3.5x5 hole 2.54: 2(2.5,0)
  silkscreen extent -5.4,-2.9 5.4,2.9, body extent -5.1,-2.39 5.1,2.81, height 9.4
CON_TP_SMD_D25mil_NoSilk [mm] "25 Mil Test Pad"
  round 0.635 smd paste-0.635: 1(0,0)
Fiducial_1mm [mm] "Fiducial 1mm"
  round 1 smd paste-1 mask+0.5: 1(-0.002,-0.006)
  LAYER 1 (Top) pour cut-out: 0,-1 -0.383,-0.924 -0.707,-0.707 -0.924,-0.383 -1,0 -1,0 -0.924,0.383 -0.707,0.707 -0.383,0.924 0,1 0,1 0.383,0.924 0.707,0.707 0.924,0.383 1,0 1,0 0.924,-0.383 0.707,-0.707 0.383,-0.924 0,-1
  body extent -0.5,-0.5 0.5,0.5, height 0.04
HDR_M_2.54_1x2_TH_V_SAM_TSW-102-08-G-S [mm] "Header Male Vertical 2 Way 2.54mm Pitch. length solder pin 5.84mm"
  oct 1.7x1.7 hole 0.9: 1(-1.27,0)
  round 1.7 hole 0.9: 2(1.27,0)
  silkscreen extent -2.52,-1.27 2.54,1.28, body extent -2.67,-1.27 2.54,1.27, height 8.38
HDR_M_2.54_1x3_TH_V_SAM_TSW-103-08-G-S [mm] "Header Male Vertical 3 Way P=2.54mm"
  oct 1.7x1.7 hole 0.9: 1(-2.54,0)
  round 1.7 hole 0.9: 2(0,0) 3(2.54,0)
  silkscreen extent -3.94,-1.4 3.96,1.4, body extent -3.94,-1.27 3.81,1.27, height 8.38
HDR_M_2.54_1x4 [mm] "Header Male Vertical 4 Way 2.54mm Pitch"
  oct 1.7x1.7 hole 0.9: 1(-3.81,0)
  round 1.7 hole 0.9: 2(-1.27,0) 3(1.27,0) 4(3.81,0)
  silkscreen extent -5.21,-1.4 5.19,1.4, body extent -5.08,-1.27 5.08,1.27, height 5.94
HDR_M_2.54_1x5_MH5.84_IH2.54_TH3.2_TH_VERT [mm] "1x5 2.54mm Pitch Male Header Vertical mount (Mating height: 5.84mm, Insulation Height: 2.54mm, Tail height: 3.2mm)"
  rect 1.8x1.8 hole 1.02: 1(-5.08,0)
  round 1.8 hole 1.02: 2(-2.54,0) 3(0,0) 4(2.54,0) 5(5.08,0)
  silkscreen extent -6.55,-1.38 6.45,1.38, body extent -6.48,-1.27 6.35,1.27, height 8.38
HDR_M_2.54_1x5_STAGGERED [mil] "Header Male Vertical 5 Way 2.54mm Pitch Staggerd DNP"
  rect 60x60 hole 42: 1(-200,-8)
  round 60 hole 42: 2(-100,8) 3(0,-8) 4(100,7.99) 5(200,-8)
  silkscreen extent -255,-55 253,55
LED_0603_Yellow [mm] "LED chip 0603"
  rect 0.8x0.8 smd: 1(-0.8,0) 2(0.8,0)
  silkscreen extent 1.5,-0.4 1.5,0.4, body extent -0.81,-0.4 0.81,0.4, height 0.6
NET_TIE_0.2mmx0.5mm [mm]
  rect 0.2x0.2 smd paste-2 mask-2: 0(0,0) 2(0.15,0)
  round 0.55 hole 0.25 mask+0.076: 1(-0.15,0)
PPAK_SO-8L [mm]
  rect 0.41x0.82 smd paste-0.05 mask+0.075: 1(-1.905,-2.787) 2(-0.635,-2.787) 3(0.635,-2.787) 4(1.905,-2.787)
  rect 5x0.51 smd paste-0.05 mask+0.075: 5(0,2.788)
  LAYER 1 (Top) region: -2.5,3.04 -2.5,2.54 -2.025,2.54 -2.025,2.54 -2.025,0.3 -2.625,0.3 -2.625,-0.3 -2.025,-0.3 -2.025,-1.087 2.025,-1.087 2.025,-0.3 2.625,-0.3 2.625,0.3 2.025,0.3 2.025,0.3 2.025,2.54 2.5,2.54 2.5,3.04
  silkscreen extent -2.93,-3.47 2.93,3.3, body extent -2.56,-3.15 2.56,3, height 1.07
QFN-64_9X9_3EP_M9 [mm]
  oval 0.85x0.3 smd: 1(-4.45,3.75) 2(-4.45,3.25) 3(-4.45,2.75) 4(-4.45,2.25) 5(-4.45,1.75) 6(-4.45,1.25) 7(-4.45,0.75) 8(-4.45,0.25) 9(-4.45,-0.25) 10(-4.45,-0.75) 11(-4.45,-1.25) 12(-4.45,-1.75) 13(-4.45,-2.25) 14(-4.45,-2.75) 15(-4.45,-3.25) 16(-4.45,-3.75) 33(4.45,-3.75) 34(4.45,-3.25) 35(4.45,-2.75) 36(4.45,-2.25) 37(4.45,-1.75) 38(4.45,-1.25) 39(4.45,-0.75) 40(4.45,-0.25) 41(4.45,0.25) 42(4.45,0.75) 43(4.45,1.25) 44(4.45,1.75) 45(4.45,2.25) 46(4.45,2.75) 47(4.45,3.25) 48(4.45,3.75)
  oval 0.3x0.85 smd: 17(-3.75,-4.45) 18(-3.25,-4.45) 19(-2.75,-4.45) 20(-2.25,-4.45) 21(-1.75,-4.45) 22(-1.25,-4.45) 23(-0.75,-4.45) 24(-0.25,-4.45) 25(0.25,-4.45) 26(0.75,-4.45) 27(1.25,-4.45) 28(1.75,-4.45) 29(2.25,-4.45) 30(2.75,-4.45) 31(3.25,-4.45) 32(3.75,-4.45) 49(3.75,4.45) 50(3.25,4.45) 51(2.75,4.45) 52(2.25,4.45) 53(1.75,4.45) 54(1.25,4.45) 55(0.75,4.45) 56(0.25,4.45) 57(-0.25,4.45) 58(-0.75,4.45) 59(-1.25,4.45) 60(-1.75,4.45) 61(-2.25,4.45) 62(-2.75,4.45) 63(-3.25,4.45) 64(-3.75,4.45)
  rect 3.5x3.2 smd: 65(1.775,-1.255)
  rect 2.19x3.53 smd: 66(-2.4,1.73)
  rect 1.93x1.4 smd: 67(2.57,2.435)
  silkscreen extent -5.54,-4.6 4.6,4.6, body extent -4.51,-4.51 4.51,4.51, height 1.2
RES_C_0402 [mm] "Chip Resistor, 2-Leads, Body 1.0x0.5mm, IPC Medium Density"
  rrect50% 0.55x0.6 smd: 1(-0.45,0) 2(0.45,0)
  body extent -0.5,-0.3 0.5,0.3, height 0.2
RES_C_0603 [mm] "Chip Resistor, 2-Leads, Body 1.6x0.8mm, IPC Medium Density"
  rrect50% 0.8x0.9 smd: 1(-0.8,0) 2(0.8,0)
  silkscreen extent -0.1,-0.38 0.1,0.38, body extent -0.8,-0.4 0.8,0.4, height 0.3
RES_C_0805 [mm] "Chip Resistor, 2-Leads, Body 2.0x1.3mm, IPC Medium Density"
  rrect50% 0.9x1.4 smd: 1(-0.95,0) 2(0.95,0)
  silkscreen extent -0.2,-0.7 0.2,0.7, body extent -1,-0.63 1,0.63, height 0.78
RES_C_1206 [mm] "Chip Resistor, 2-Leads, Body 3.2x1.6mm, IPC Medium Density"
  rrect50% 1x1.75 smd: 1(-1.5,0) 2(1.5,0)
  silkscreen extent -0.6,-0.77 0.6,0.78, body extent -1.6,-0.8 1.6,0.8, height 1
RES_C_2512 [mm] "Chip Resistor, 2-Leads, Body 6.3x3.1mm, IPC Medium Density"
  rect 1.05x3.3 smd: 1(-3.075,0) 2(3.075,0)
  silkscreen extent -2.15,-1.55 2.15,1.55, body extent -3.17,-1.5 3.18,1.5, height 1.6
SOD-123 [mm] "Diode SOD-123 Body L=2.85, W= 1.8"
  rect 0.9x1.2 smd: 1(-1.7,0) 2(1.7,0)
  silkscreen extent -2.02,-1.1 2.02,1.1, body extent -1.92,-0.85 1.93,0.85, height 1.43
SOD-123W [mm] "L3.7W1.9H1.1"
  rect 1.5x1.3 smd: 1(-1.6,0) 2(1.6,0)
  silkscreen extent -1.8,-1.25 2.36,1.24, body extent -1.83,-0.95 1.88,0.95, height 1.1
SOT-23-3 [mm]
  rect 0.65x1.05 smd: 1(-0.95,-1.15) 2(0.95,-1.15) 3(0,1.15)
  silkscreen extent -1.55,-0.7 1.55,0.72, body extent -1.5,-1.25 1.5,1.25, height 1.09
SOT-323-3 [mm] "SC-70-3 Equivalent"
  rect 0.45x0.95 smd: 1(-0.65,-1.1) 2(0.65,-1.1) 3(0,1.1)
  silkscreen extent -1.2,-0.8 1.2,0.8, body extent -1.1,-1.12 1.1,1.12, height 1.1
TP_1.1x0.6 [mm] "Test Point round, diam=1.1mm, drill=0.6mm for Test Probe Only"
  round 1.1 hole 0.6: 1(0,0)
  silkscreen extent -0.62,-0.8 0.8,0.8, body extent -0.25,-0.25 0.25,0.25
TP_3.0X2.3X1.3HOLE [mm] "No BOM TP/Multi-purpose Thru-hole Pad. Dia=3.0mm, Hole Dia=1.3mm"
  oval 3x2.3 hole 1.3: 1(0,0)
TP_TH_0.7PADX0.4HOLE [mm]
  round 0.7 hole 0.4 paste-2539.97 mask+0.051: 1(0,0)

## Part data
AUX1 AUX3 IA IB RSVD1 RSVD2 TP12 TP13 TP14 TP19 WAKE: library part CON3082, "Test Point", Assembly Type=SMD, Category=Connector, ComponentLink1Description="SVN Datasheet", ComponentLink2Description="Local Datasheet", ComponentLink3Description="Open Symbol", ComponentLink3URL="C:\ALTIUM_WORK\00001_MCHP-CDB\Library\LibraryRefs\Test Point No BOM.SchLib", ComponentLink4Description="Open Footprint", ComponentLink4URL=C:\ALTIUM_WORK\00001_MCHP-CDB\Library\Footprints\CON_TP_SMD_D25mil_NoSilk.PcbLib, ComponentLink5Description="Open Footprint 2", ComponentLink6Description="Open Footprint 3", ComponentLink7Description="Open Footprint 4", Description_="CON TP PAD PCB SMD D25mil", Dev Tools Status=Design, MCHP-ID=CON3082, Owner="James Boomer", Populated=YES, Quantity Override=1, Restricted Sourcing=No, Revision=1, Status="MCL Design", Symbol="Test Point No BOM", Type="Test Point No BOM"
AUX2 HSA HSB HSC IBUS LSA LSB LSC TEMP TP17 VA VB VBOOT VBUS VC: library part CON2938, "Test Point", Assembly Type=TH, Category=Connector, ComponentLink1Description="SVN Datasheet", ComponentLink2Description="Local Datasheet", ComponentLink3Description="Open Symbol", ComponentLink3URL="C:\ALTIUM_WORK\00001_MCHP-CDB\Library\LibraryRefs\Test Point No BOM.SchLib", ComponentLink4Description="Open Footprint", ComponentLink4URL=C:\ALTIUM_WORK\00001_MCHP-CDB\Library\Footprints\TP_TH_0.7PADX0.4HOLE.PcbLib, ComponentLink5Description="Open Footprint 2", ComponentLink6Description="Open Footprint 3", ComponentLink7Description="Open Footprint 4", Description_="CON TP PAD PCB TH D0.7H0.4", Dev Tools Status=Design, MCHP-ID=CON2938, Owner="Severino Balong Jr.", Populated=DNP, Quantity Override=1, Restricted Sourcing=No, Revision=1, Status="MCL Design", Symbol="Test Point No BOM", Type="Test Point No BOM"
C1 C46 C55 C65: library part CAP2655, Manufacturer 1=KEMET, Manufacturer 2=Murata, Manufacturer Part Number 1=C0402C102J5GAC7867, Manufacturer Part Number 2=GRM1555C1H102JA01D, Operating Temperature="-55C to +125C", Package=0402, Supplier Part Number 1=399-C0402C102J5GAC7867TR-ND, Temperature Coefficient="C0G, NP0", Tolerance=5%, Voltage=50V, Category=Capacitor, ComponentLink1Description="SVN Datasheet", ComponentLink1URL=https://chn-vm-apps.microchip.com/mchprepo/parts/Datasheets/GRM1555C1H102JA01D.pdf, ComponentLink2Description="Local Datasheet", ComponentLink2URL=C:\ALTIUM_WORK\00001_MCHP-CDB\Datasheets\GRM1555C1H102JA01D.pdf, ComponentLink3Description="Open Symbol", ComponentLink3URL="C:\ALTIUM_WORK\00001_MCHP-CDB\Library\LibraryRefs\Capacitor NP.SchLib", ComponentLink4Description="Open Footprint", ComponentLink4URL=C:\ALTIUM_WORK\00001_MCHP-CDB\Library\Footprints\CAP_C_0402.PcbLib, ComponentLink5Description="Open Footprint 2", ComponentLink6Description="Open Footprint 3", ComponentLink7Description="Open Footprint 4", Description_="CAP CER 1000pF 50V 5% NP0 SMD 0402", Dev Tools Status=Production, MCHP-ID=CAP2655, Owner="Narasimha Murthy", Populated=YES, Quantity Override=1, Restricted Sourcing=No, Revision=2, Status="MCL Design", Supplier 1=Digi-Key, Supplier 2=Digi-Key, Supplier Part Number 2=490-3244-2-ND, Symbol="Capacitor NP", Type=Ceramic
C2: library part CAP0608, Manufacturer 1=Murata, Manufacturer 2="Samsung Electro-Mechanics", Manufacturer 3=Yageo, Manufacturer Part Number 1=GRM1555C1H150JA01D, Manufacturer Part Number 2=CL05C150JB5NNN, Manufacturer Part Number 3=CC0402JRNPO9BN150, Operating Temperature="-55C to +125C", Package=0402, Supplier Part Number 1=490-5888-2-ND, Temperature Coefficient=NP0, Tolerance=5%, Voltage=50V, Category=Capacitor, ComponentLink1Description="SVN Datasheet", ComponentLink1URL=https://chn-vm-apps.microchip.com/mchprepo/parts/Datasheets/L0005E.pdf, ComponentLink2Description="Local Datasheet", ComponentLink2URL=C:\ALTIUM_WORK\00001_MCHP-CDB\Datasheets\L0005E.pdf, ComponentLink3Description="Open Symbol", ComponentLink3URL="C:\ALTIUM_WORK\00001_MCHP-CDB\Library\LibraryRefs\Capacitor NP.SchLib", ComponentLink4Description="Open Footprint", ComponentLink4URL=C:\ALTIUM_WORK\00001_MCHP-CDB\Library\Footprints\CAP_C_0402.PcbLib, ComponentLink5Description="Open Footprint 2", ComponentLink6Description="Open Footprint 3", ComponentLink7Description="Open Footprint 4", Description_="CAP CER 15pF 50V 5% NP0 SMD 0402", Dev Tools Status=Production, MCHP-ID=CAP0608, Populated=Yes, Quantity Override=1, Restricted Sourcing=No, Revision=4, Status="MCL Design", Supplier 1=Digi-Key, Supplier 2="Samsung Electro-Mechanics", Supplier 3=Yageo, Supplier Part Number 2=CL05C150JB5NNN, Supplier Part Number 3=CC0402JRNPO9BN150, Symbol="Capacitor NP", Type=Ceramic
C3: library part CAP3116, "Capacitor", Manufacturer 1="Würth Elektronik", Manufacturer Part Number 1=860020474014, Operating Temperature="-40C to +105C", Package=P3.5D8H13, Supplier Part Number 1=732-8831-1-ND, Tolerance=20%, Voltage=25V, Category=Capacitor, ComponentLink1Description="SVN Datasheet", ComponentLink1URL=https://chn-vm-apps.microchip.com/mchprepo/parts/Datasheets/860020474014.pdf, ComponentLink2Description="Local Datasheet", ComponentLink2URL=C:\ALTIUM_WORK\00001_MCHP-CDB\Datasheets\860020474014.pdf, ComponentLink3Description="Open Symbol", ComponentLink3URL="C:\ALTIUM_WORK\00001_MCHP-CDB\Library\LibraryRefs\Capacitor POL.SchLib", ComponentLink4Description="Open Footprint", ComponentLink4URL=C:\ALTIUM_WORK\00001_MCHP-CDB\Library\Footprints\CAP_RAD_P3.5D8H13_WE.PcbLib, ComponentLink5Description="Open Footprint 2", ComponentLink6Description="Open Footprint 3", ComponentLink7Description="Open Footprint 4", Description_="CAP ALU 470uF 25V 20% RAD P3.5D8H13", Dev Tools Status=Design, MCHP-ID=CAP3116, Owner="Severino Balong Jr.", Populated=YES, Quantity Override=1, Restricted Sourcing=No, Revision=1, Status="MCL Design", Supplier 1=Digi-Key, Symbol="Capacitor POL", Type=Aluminum
C4 C5 C6 C39 C53 C57 C60 C62 C118: library part CAP1345, Manufacturer 1="TDK Corporation", Manufacturer Part Number 1=C1005X7R1E104K050BB, Operating Temperature="-55°C to 125°C", Package=0402, Supplier Part Number 1=445-7348-1-ND, Temperature Coefficient=X7R, Tolerance=10%, Voltage=25V, Category=Capacitor, ComponentLink1Description="SVN Datasheet", ComponentLink1URL=https://chn-vm-apps.microchip.com/mchprepo/parts/Datasheets/mlcc_commercial_general_en, ComponentLink2Description="Local Datasheet", ComponentLink2URL=C:\ALTIUM_WORK\00001_MCHP-CDB\Datasheets\mlcc_commercial_general_en, ComponentLink3Description="Open Symbol", ComponentLink3URL="C:\ALTIUM_WORK\00001_MCHP-CDB\Library\LibraryRefs\Capacitor NP.SchLib", ComponentLink4Description="Open Footprint", ComponentLink4URL=C:\ALTIUM_WORK\00001_MCHP-CDB\Library\Footprints\CAP_C_0402.PcbLib, ComponentLink5Description="Open Footprint 2", ComponentLink6Description="Open Footprint 3", ComponentLink7Description="Open Footprint 4", Description_="CAP CER 0.1uF 25V 10% X7R SMD 0402", Dev Tools Status=Production, MCHP-ID=CAP1345, Owner="Randolph Sobrepena", Populated=YES, Quantity Override=1, Restricted Sourcing=No, Revision=2, Status="MCL Design", Supplier 1=Digi-Key, Symbol="Capacitor NP", Type=Ceramic
C15 C50: library part CAP2578, Manufacturer 1="Samsung Electro-Mechanics", Manufacturer Part Number 1=CL32B106KMVNNWE, Operating Temperature="-55C to +125C", Package=1210, Supplier Part Number 1=1276-7053-1-ND, Temperature Coefficient=X7R, Tolerance=10%, Voltage=63V, Category=Capacitor, ComponentLink1Description="SVN Datasheet", ComponentLink1URL=https://chn-vm-apps.microchip.com/mchprepo/parts/Datasheets/CL32B106KMVNNWE_Spec.pdf, ComponentLink2Description="Local Datasheet", ComponentLink2URL=C:\ALTIUM_WORK\00001_MCHP-CDB\Datasheets\CL32B106KMVNNWE_Spec.pdf, ComponentLink3Description="Open Symbol", ComponentLink3URL="C:\ALTIUM_WORK\00001_MCHP-CDB\Library\LibraryRefs\Capacitor NP.SchLib", ComponentLink4Description="Open Footprint", ComponentLink4URL=C:\ALTIUM_WORK\00001_MCHP-CDB\Library\Footprints\CAP_C_1210.PcbLib, ComponentLink5Description="Open Footprint 2", ComponentLink6Description="Open Footprint 3", ComponentLink7Description="Open Footprint 4", Description_="CAP CER 10uF 63V 10% X7R SMD 1210", Dev Tools Status=Design, MCHP-ID=CAP2578, Owner="Narasimha Murthy", Populated=YES, Quantity Override=1, Revision=1, Status="MCL Design", Supplier 1=Digi-Key, Symbol="Capacitor NP", Type=Ceramic
C48: library part CAP2232, Manufacturer 1="TDK Corporation", Manufacturer Part Number 1=CGA5L1X7R1H106K160AC, Operating Temperature="-55°C ~ 125°C", Package=1206, Supplier Part Number 1=445-180362-1-ND, Temperature Coefficient=X7R, Voltage=50V, Category=Capacitor, ComponentLink1Description="SVN Datasheet", ComponentLink1URL=https://chn-vm-apps.microchip.com/mchprepo/parts/Datasheets/mlcc_automotive_general_en.pdf, ComponentLink2Description="Local Datasheet", ComponentLink2URL=C:\ALTIUM_WORK\00001_MCHP-CDB\Datasheets\mlcc_automotive_general_en.pdf, ComponentLink3Description="Open Symbol", ComponentLink3URL="C:\ALTIUM_WORK\00001_MCHP-CDB\Library\LibraryRefs\Capacitor NP.SchLib", ComponentLink4Description="Open Footprint", ComponentLink4URL=C:\ALTIUM_WORK\00001_MCHP-CDB\Library\Footprints\CAP_C_1206.PcbLib, ComponentLink5Description="Open Footprint 2", ComponentLink6Description="Open Footprint 3", ComponentLink7Description="Open Footprint 4", Description_="CAP CER 10uF 50V 10% X7R SMD 1206 AEC-Q200", Dev Tools Status=Production, MCHP-ID=CAP2232, Owner="Sam Charles", Populated=YES, Quantity Override=1, Restricted Sourcing=No, Revision=2, Status="MCL Design", Supplier 1=Digi-Key, Symbol="Capacitor NP", Type=Ceramic
C49 C100 C102 C103: library part CAP1292, "Capacitor", Manufacturer 1="TDK Corporation", Manufacturer Part Number 1=C3216X7R1H475K160AC, Operating Temperature="-55C to +125C", Package=1206, Supplier Part Number 1=445-8032-1-ND, Temperature Coeffcient=X7R, Tolerance=10%, Voltage=50V, Category=Capacitor, ComponentLink1Description="SVN Datasheet", ComponentLink1URL=https://chn-vm-apps.microchip.com/mchprepo/parts/Datasheets/mlcc_commercial_general_en.pdf, ComponentLink2Description="Local Datasheet", ComponentLink2URL=C:\ALTIUM_WORK\00001_MCHP-CDB\Datasheets\mlcc_commercial_general_en.pdf, ComponentLink3Description="Open Symbol", ComponentLink3URL="C:\ALTIUM_WORK\00001_MCHP-CDB\Library\LibraryRefs\Capacitor NP.SchLib", ComponentLink4Description="Open Footprint", ComponentLink4URL=C:\ALTIUM_WORK\00001_MCHP-CDB\Library\Footprints\CAP_C_1206.PcbLib, ComponentLink5Description="Open Footprint 2", ComponentLink6Description="Open Footprint 3", ComponentLink7Description="Open Footprint 4", Description_="CAP CER 4.7uF 50V 10% X7R SMD 1206", Dev Tools Status=Production, MCHP-ID=CAP1292, Owner="Jairuz Agang-ang", Populated=YES, Quantity Override=1, Revision=1, Status="MCL Design", Supplier 1=Digi-Key, Symbol="Capacitor NP", Type=Ceramic
C51: library part CAP1211, "Capacitor", Manufacturer 1=AVX, Manufacturer 2=KEMET, Manufacturer 3="TDK Corporation", Manufacturer Part Number 1=08053C105K4Z2A, Manufacturer Part Number 2=C0805C105K3RACTU, Manufacturer Part Number 3=C2012X7R1E105K125AB, Operating Temperature="-55C to +125C", Package=0805, Supplier Part Number 1=478-6357-2-ND, Temperature Coeffcient=X7R, Tolerance=10%, Voltage=25V, Category=Capacitor, ComponentLink1Description="SVN Datasheet", ComponentLink1URL=https://chn-vm-apps.microchip.com/mchprepo/parts/Datasheets/flexiterm.pdf, ComponentLink2Description="Local Datasheet", ComponentLink2URL=C:\ALTIUM_WORK\00001_MCHP-CDB\Datasheets\flexiterm.pdf, ComponentLink3Description="Open Symbol", ComponentLink3URL="C:\ALTIUM_WORK\00001_MCHP-CDB\Library\LibraryRefs\Capacitor NP.SchLib", ComponentLink4Description="Open Footprint", ComponentLink4URL=C:\ALTIUM_WORK\00001_MCHP-CDB\Library\Footprints\CAP_C_0805.PcbLib, ComponentLink5Description="Open Footprint 2", ComponentLink6Description="Open Footprint 3", ComponentLink7Description="Open Footprint 4", Description_="CAP CER 1uF 25V 10% X7R SMD 0805", Dev Tools Status=Production, MCHP-ID=CAP1211, Owner="Tad Ahlvers", Populated=YES, Quantity Override=1, Revision=1, Status="MCL Design", Supplier 1=Digi-Key, Supplier 2=Digi-Key, Supplier 3=Digi-Key, Supplier Part Number 2=C0805C105K3RACTU-ND, Supplier Part Number 3=445-1354-1-ND, Symbol="Capacitor NP", Type=Ceramic
C54 C58 C61 C63: library part CAP1071, Manufacturer 1=Yageo, Manufacturer 2="Samsung Electro-Mechanics", Manufacturer Part Number 1=CC0402KRX7R9BB103, Manufacturer Part Number 2=CL05B103KB5NNN, Operating Temperature="-55C to +125C", Package=0402, Supplier Part Number 1=311-1349-2-ND, Temperature Coefficient=X7R, Tolerance=10%, Voltage=50V, Category=Capacitor, ComponentLink1Description="SVN Datasheet", ComponentLink1URL=https://chn-vm-apps.microchip.com/mchprepo/parts/Datasheets/UPY-GPHC_X7R_6.3V-to-50V_8.pdf, ComponentLink2Description="Local Datasheet", ComponentLink2URL=C:\ALTIUM_WORK\00001_MCHP-CDB\Datasheets\UPY-GPHC_X7R_6.3V-to-50V_8.pdf, ComponentLink3Description="Open Symbol", ComponentLink3URL="C:\ALTIUM_WORK\00001_MCHP-CDB\Library\LibraryRefs\Capacitor NP.SchLib", ComponentLink4Description="Open Footprint", ComponentLink4URL=C:\ALTIUM_WORK\00001_MCHP-CDB\Library\Footprints\CAP_C_0402.PcbLib, ComponentLink5Description="Open Footprint 2", ComponentLink6Description="Open Footprint 3", ComponentLink7Description="Open Footprint 4", Description_="CAP CER 10000pF 50V 10% X7R SMD 0402", Dev Tools Status=Production, MCHP-ID=CAP1071, Owner="Tad Ahlvers", Populated=YES, Quantity Override=1, Restricted Sourcing=No, Revision=4, Status="MCL Design", Supplier 1=Digi-Key, Supplier 2="Samsung Electro-Mechanics", Supplier Part Number 2=CL05B103KB5NNN, Symbol="Capacitor NP", Type=Ceramic
C56: library part CAP2425, Manufacturer 1="TDK Corporation", Manufacturer Part Number 1=CGB2A1X5R1E105K033BC, Operating Temperature="-55C to +85C", Package=0402, Supplier Part Number 1=445-13185-1-ND, Temperature Coefficient=X5R, Tolerance=10%, Voltage=25V, Category=Capacitor, ComponentLink1Description="SVN Datasheet", ComponentLink1URL=https://chn-vm-apps.microchip.com/mchprepo/parts/Datasheets/mlcc_commercial_lowprofile_en.pdf, ComponentLink2Description="Local Datasheet", ComponentLink2URL=C:\ALTIUM_WORK\00001_MCHP-CDB\Datasheets\mlcc_commercial_lowprofile_en.pdf, ComponentLink3Description="Open Symbol", ComponentLink3URL="C:\ALTIUM_WORK\00001_MCHP-CDB\Library\LibraryRefs\Capacitor NP.SchLib", ComponentLink4Description="Open Footprint", ComponentLink4URL=C:\ALTIUM_WORK\00001_MCHP-CDB\Library\Footprints\CAP_C_0402.PcbLib, ComponentLink5Description="Open Footprint 2", ComponentLink6Description="Open Footprint 3", ComponentLink7Description="Open Footprint 4", Description_="1UF 0402 CER 25V 10% X5R", Dev Tools Status=Design, MCHP-ID=CAP2425, Owner="Tim Moffat", Populated=YES, Quantity Override=1, Restricted Sourcing=Yes, Revision=1, Status="MCL Design", Supplier 1=Digi-Key, Symbol="Capacitor NP", Type=Ceramic
C69 C71: library part CAP1039, Manufacturer 1="Samsung Electro-Mechanics", Manufacturer 2=Murata, Manufacturer 3=Yageo, Manufacturer Part Number 1=CL05C101JB5NNNC, Manufacturer Part Number 2=GRM1555C1H101JA01D, Manufacturer Part Number 3=CC0402JRNPO9BN101, Operating Temperature="-55C to +125C", Package=0402, Supplier Part Number 1=1276-1025-1-ND, Temperature Coefficient=C0G, Tolerance=5%, Voltage=50V, Category=Capacitor, ComponentLink1Description="SVN Datasheet", ComponentLink1URL=https://chn-vm-apps.microchip.com/mchprepo/parts/Datasheets/L0005E.pdf, ComponentLink2Description="Local Datasheet", ComponentLink2URL=C:\ALTIUM_WORK\00001_MCHP-CDB\Datasheets\L0005E.pdf, ComponentLink3Description="Open Symbol", ComponentLink3URL="C:\ALTIUM_WORK\00001_MCHP-CDB\Library\LibraryRefs\Capacitor NP.SchLib", ComponentLink4Description="Open Footprint", ComponentLink4URL=C:\ALTIUM_WORK\00001_MCHP-CDB\Library\Footprints\CAP_C_0402.PcbLib, ComponentLink5Description="Open Footprint 2", ComponentLink6Description="Open Footprint 3", ComponentLink7Description="Open Footprint 4", Description_="CAP CER 100pF 50V 5% C0G SMD 0402", Dev Tools Status=Production, MCHP-ID=CAP1039, Owner="Sompoch Loboonlert", Populated=Yes, Quantity Override=1, Restricted Sourcing=No, Revision=5, Status="MCL Design", Supplier 1=Digi-Key, Supplier 2=Digi-Key, Supplier 3=Yageo, Supplier Part Number 2=490-5922-2-ND, Supplier Part Number 3=CC0402JRNPO9BN101, Symbol="Capacitor NP", Type=Ceramic
C70: library part CAP2601, Manufacturer 1="TDK Corporation", Manufacturer Part Number 1=CGA3E2X7R2A472K080AA, Operating Temperature="-55C to +125C", Package=0603, Supplier Part Number 1=445-5810-1-ND, Temperature Coefficient=X7R, Tolerance=10%, Voltage=100V, Category=Capacitor, ComponentLink1Description="SVN Datasheet", ComponentLink1URL=https://chn-vm-apps.microchip.com/mchprepo/parts/Datasheets/mlcc_automotive_general_en.pdf, ComponentLink2Description="Local Datasheet", ComponentLink2URL=C:\ALTIUM_WORK\00001_MCHP-CDB\Datasheets\mlcc_automotive_general_en.pdf, ComponentLink3Description="Open Symbol", ComponentLink3URL="C:\ALTIUM_WORK\00001_MCHP-CDB\Library\LibraryRefs\Capacitor NP.SchLib", ComponentLink4Description="Open Footprint", ComponentLink4URL=C:\ALTIUM_WORK\00001_MCHP-CDB\Library\Footprints\CAP_C_0603.PcbLib, ComponentLink5Description="Open Footprint 2", ComponentLink6Description="Open Footprint 3", ComponentLink7Description="Open Footprint 4", Description_="CAP CER 4700pF 100V 10% X7R SMD 0603 AEC-Q200", Dev Tools Status=Design, MCHP-ID=CAP2601, Owner="Narasimha Murthy", Populated=YES, Quantity Override=1, Revision=1, Status="MCL Design", Supplier 1=Digi-Key, Symbol="Capacitor NP", Type=Ceramic
C75 C76 C78: library part CAP0594, "Capacitor", Manufacturer 1=AVX, Manufacturer 2=TDK, Manufacturer 3="Murata Electronics North America", Manufacturer Part Number 1=06035A102JAT2A, Manufacturer Part Number 2=C1608C0G1H102J, Manufacturer Part Number 3=GCM1885C1H102JA16D, Operating Temperature="-55C to +125C", Package=0603, Supplier Part Number 1=478-1187-2-ND, Temperature Coeffcient=C0G, Tolerance=5%, Voltage=50V, Category=Capacitor, ComponentLink1Description="SVN Datasheet", ComponentLink1URL=https://chn-vm-apps.microchip.com/mchprepo/parts/Datasheets/smccp.pdf, ComponentLink2Description="Local Datasheet", ComponentLink2URL=C:\ALTIUM_WORK\00001_MCHP-CDB\Datasheets\smccp.pdf, ComponentLink3Description="Open Symbol", ComponentLink3URL="C:\ALTIUM_WORK\00001_MCHP-CDB\Library\LibraryRefs\Capacitor NP.SchLib", ComponentLink4Description="Open Footprint", ComponentLink4URL=C:\ALTIUM_WORK\00001_MCHP-CDB\Library\Footprints\CAP_C_0603.PcbLib, ComponentLink5Description="Open Footprint 2", ComponentLink6Description="Open Footprint 3", ComponentLink7Description="Open Footprint 4", Description_="CAP CER 1000pF 50V 5% C0G SMD 0603", Dev Tools Status=Production, MCHP-ID=CAP0594, Populated=Yes, Quantity Override=1, Revision=1, Status="MCL Design", Supplier 1=Digi-Key, Supplier 2=Digi-Key, Supplier 3=Digi-Key, Supplier Part Number 2=445-1293-2-ND, Supplier Part Number 3=490-4768-1-ND, Symbol="Capacitor NP", Type=Ceramic